# EAGLE board SparkFun Qwiic Mini Human Presence Sensor - STHS34PF80-Panel (EAGLE 9.6.2), part 1 of 4
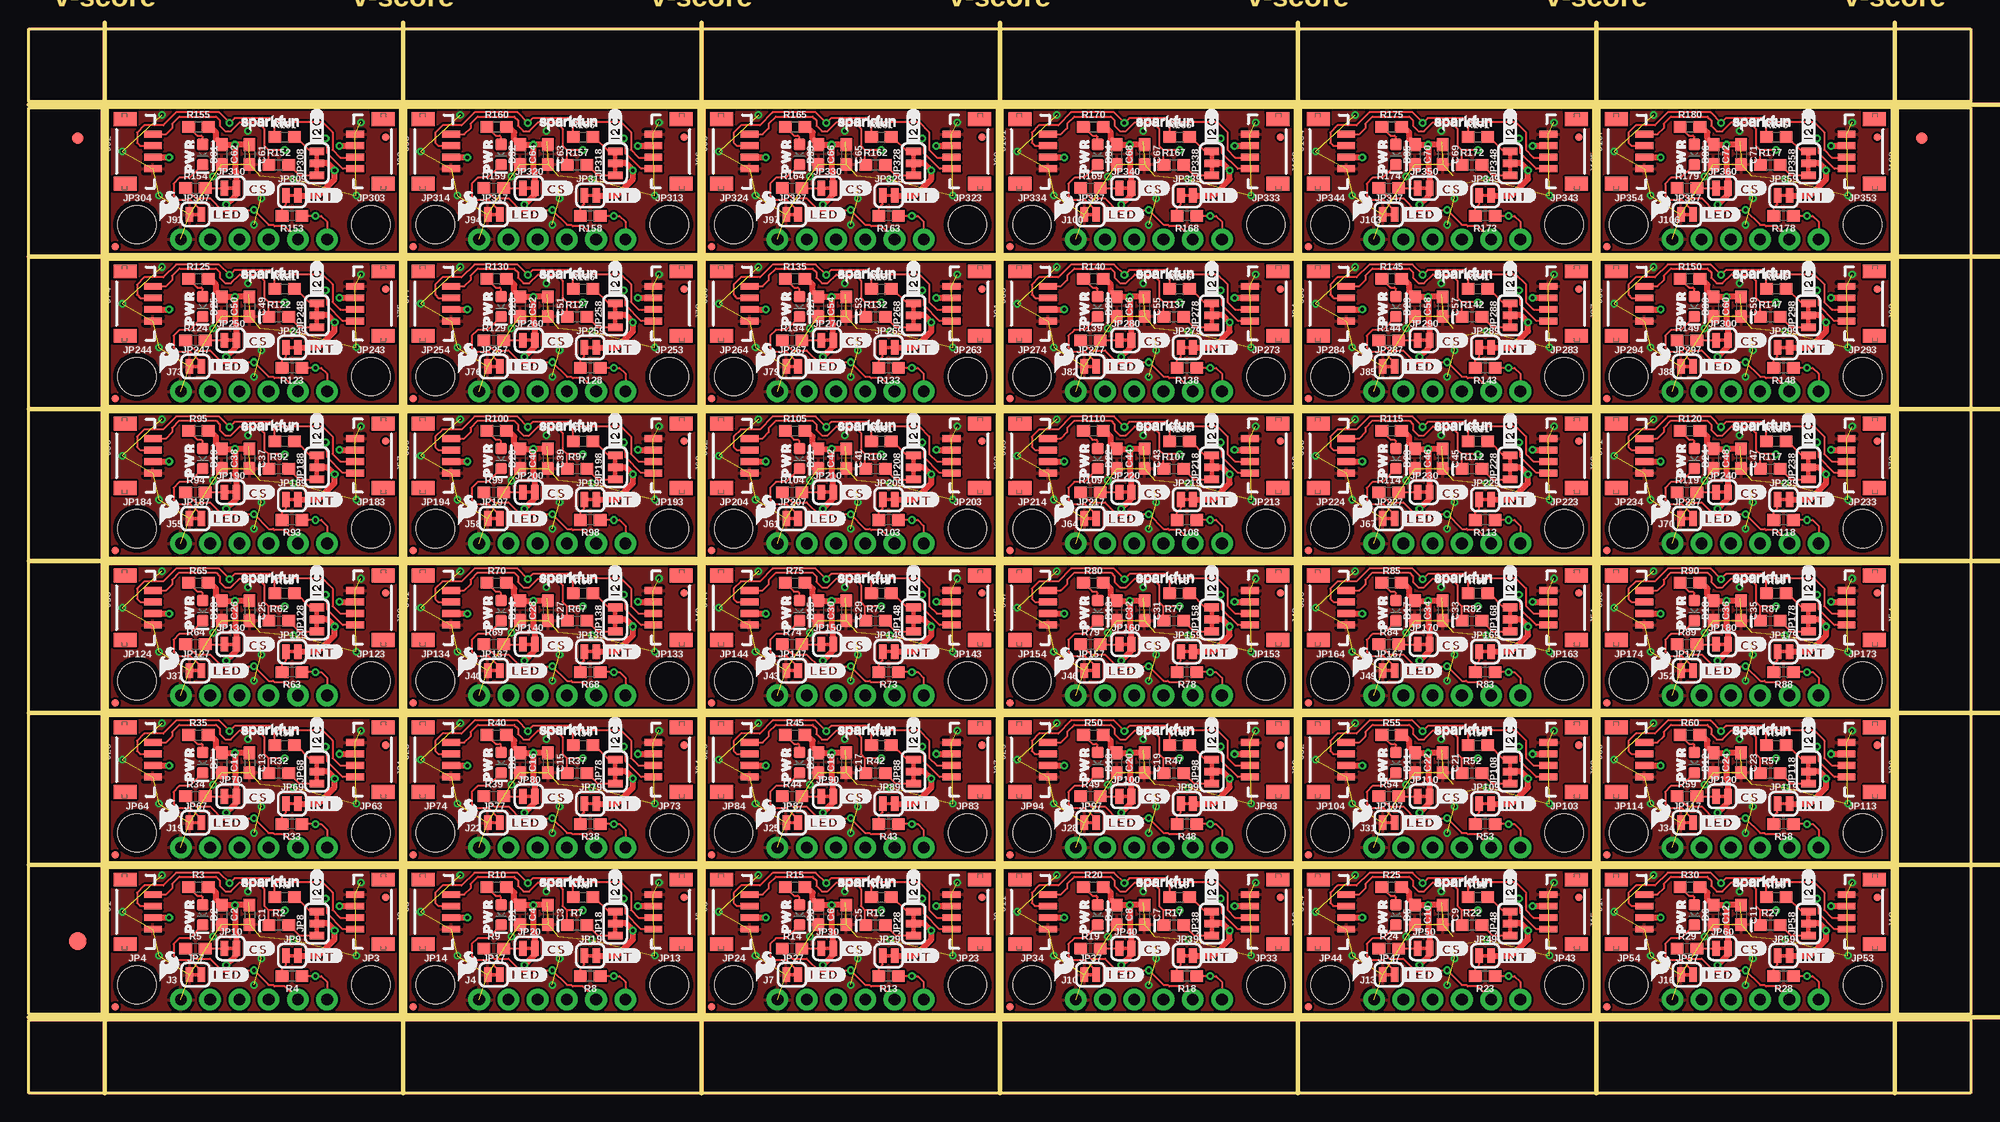
[diagram p0: board, top side]
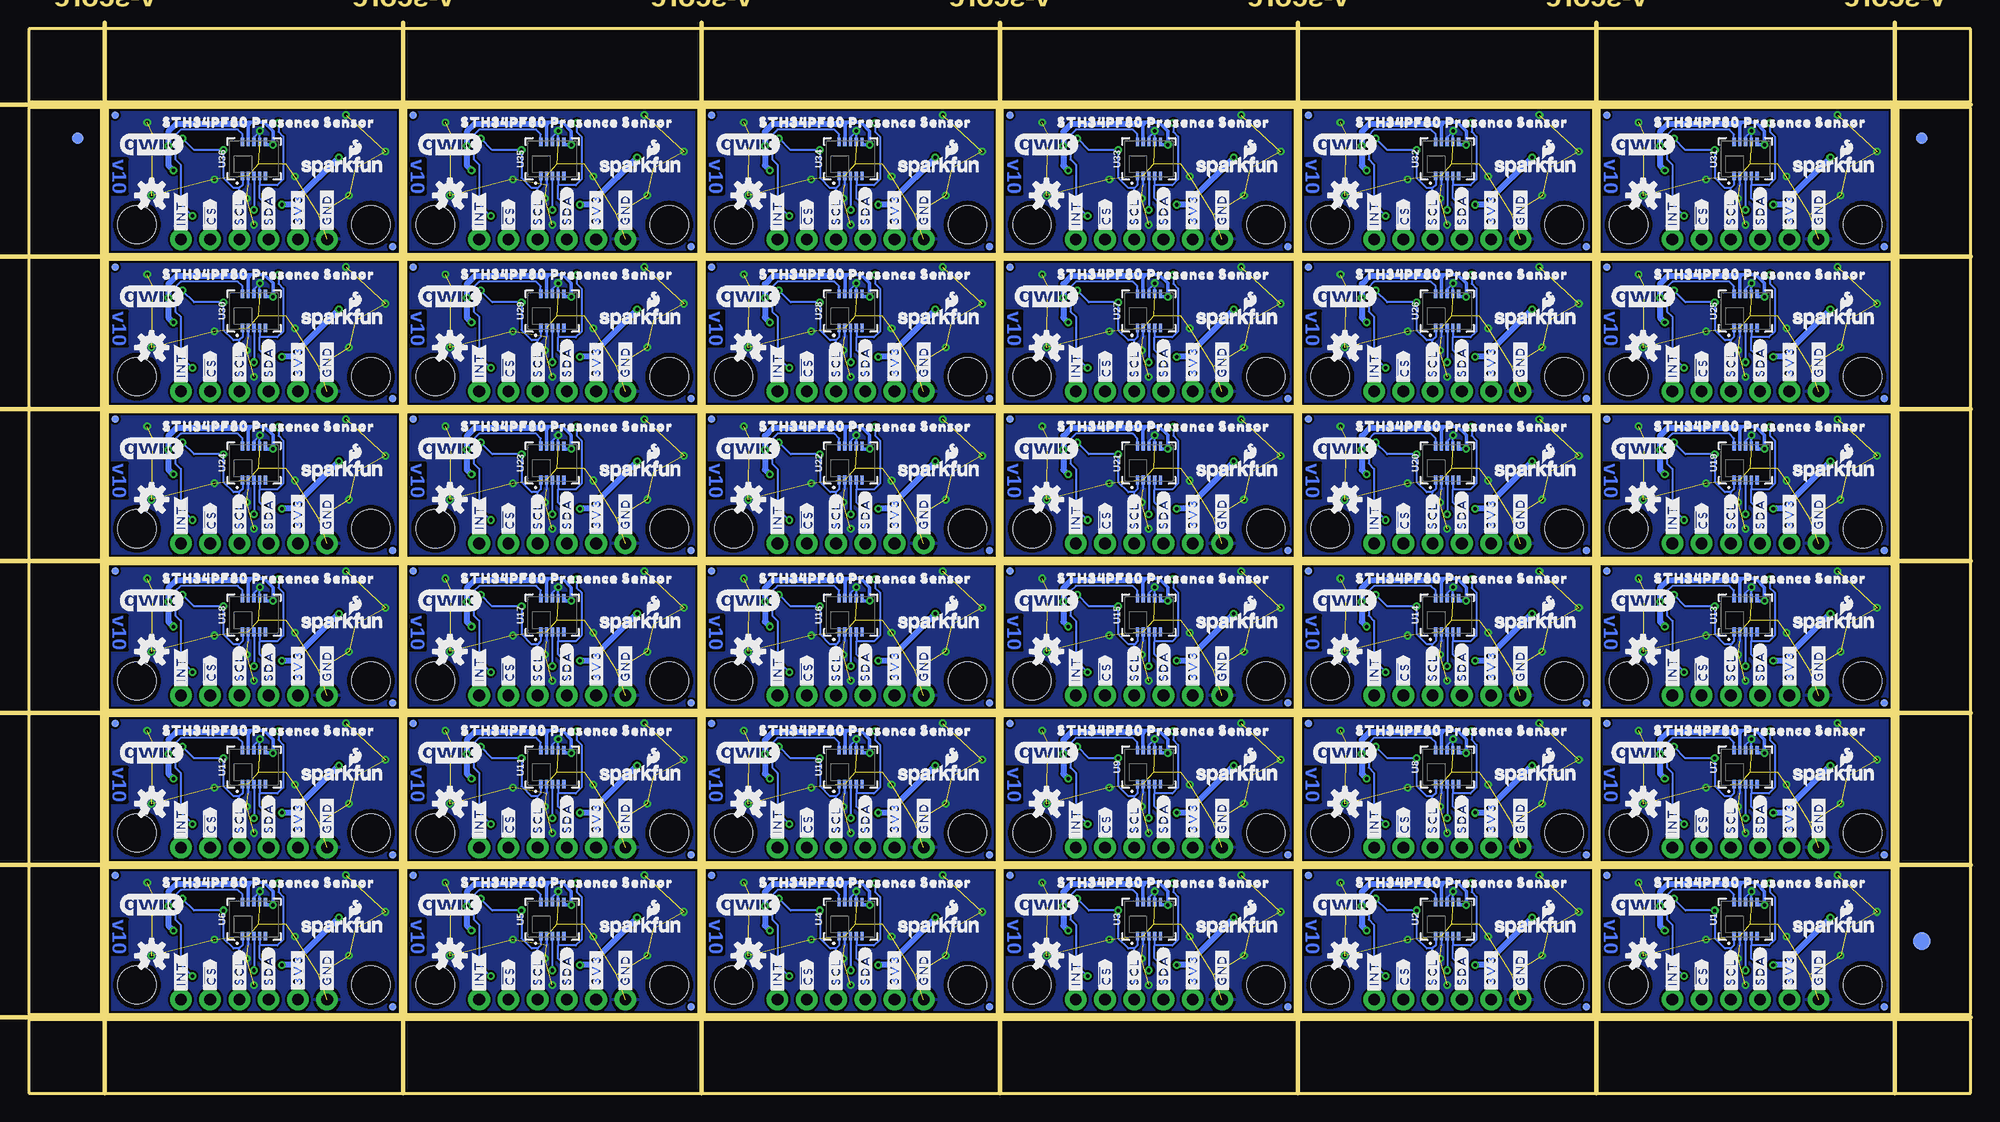
[diagram p1: board, bottom side, seen from below]

Size 168.66 x 92.46 mm. Coordinates in mm from the lower left corner, seen from the top.
Outline: 160 segments
Copper layers (1*16): Top 0.035mm / dielectric 1.5mm / Bottom 0.035mm
Design rules "SparkFun Qwiic Mini Human Presence Sensor - STHS34PF80": minimum track width 7mil, minimum drill 0.3mm, track to track 7mil, track to pad 7mil, pad to pad 7mil, via to via 7mil, smd to smd 7mil, copper to edge 7mil, drill to drill 7mil, minimum pad ring 7mil, minimum via ring 7mil, stop-mask expansion 3mil, vias tented up to drill 25mil, thermal gap 10mil
bKeepout: area 17.3,13.3 to 21.8,16.9; area 43.2,13.3 to 47.8,16.9; area 69.1,13.3 to 73.7,16.9; area 95,13.3 to 99.6,16.9; area 120.9,13.3 to 125.5,16.9; area 146.8,13.3 to 151.4,16.9; area 17.3,26.5 to 21.8,30.1; area 43.2,26.5 to 47.8,30.1; area 69.1,26.5 to 73.7,30.1; area 95,26.5 to 99.6,30.1; area 120.9,26.5 to 125.5,30.1; area 146.8,26.5 to 151.4,30.1; 24 more areas
bRestrict: area 17.3,13.3 to 21.8,16.9; area 43.2,13.3 to 47.8,16.9; area 69.1,13.3 to 73.7,16.9; area 95,13.3 to 99.6,16.9; area 120.9,13.3 to 125.5,16.9; area 146.8,13.3 to 151.4,16.9; area 17.3,26.5 to 21.8,30.1; area 43.2,26.5 to 47.8,30.1; area 69.1,26.5 to 73.7,30.1; area 95,26.5 to 99.6,30.1; area 120.9,26.5 to 125.5,30.1; area 146.8,26.5 to 151.4,30.1; 24 more areas
Milling: 14 lines

## Footprints (pad centres in the part's own frame; a part is rotated, then mirrored left to right if it is on the bottom)
0603 = smd 1.1 x 1: 1 -0.85,0; 2 0.85,0
LED-0603 = smd 1 x 1: A -0.877,0; C 0.877,0
FIDUCIAL-1X2 = smd 1 x 1: 1 0,0
FIDUCIAL-1.5X3 = smd 1.5 x 1.5: 1 0,0
JST04_1MM_VERT = smd 0.6 x 1.55: 1 -1.5,0.775; 2 -0.5,0.775; 3 0.5,0.775; 4 1.5,0.775 | smd 1.2 x 2: NC1 -2.8,3.2; NC2 2.8,3.2
1X06_NO_SILK = drill 1.016 pad 1.88: 1 0,0; 2 2.54,0; 3 5.08,0; 4 7.62,0; 5 10.16,0; 6 12.7,0
FIDUCIAL-MICRO = smd 0.635 x 0.635: 1 0,0
STAND-OFF = hole 3.302: 0,0
SMT-JUMPER_2_NC_TRACE_SILK = smd 0.66 x 1.27: 1 -0.521,0; 2 0.521,0
SMT-JUMPER_3_2-NC_TRACE_SILK = smd 0.66 x 1.27: 1 -1.041,0; 2 0,0; 3 1.041,0
OLGA-10L = smd 0.75 x 0.285: 1 -1.475,1; 2 -1.475,0.5; 3 -1.475,0; 4 -1.475,-0.5; 5 -1.475,-1; 6 1.475,-1; 7 1.475,-0.5; 8 1.475,0; 9 1.475,0.5; 10 1.475,1

## Placement (x,y rotation side)
C1  1.0uF  [0603]  19.18,15.49 270 top
C2  0.1uF  [0603]  16.76,15.49 270 top
C3  1.0uF  [0603]  45.08,15.49 270 top
C4  0.1uF  [0603]  42.67,15.49 270 top
C5  1.0uF  [0603]  70.99,15.49 270 top
C6  0.1uF  [0603]  68.58,15.49 270 top
C7  1.0uF  [0603]  96.9,15.49 270 top
C8  0.1uF  [0603]  94.49,15.49 270 top
C9  1.0uF  [0603]  122.81,15.49 270 top
C10  0.1uF  [0603]  120.4,15.49 270 top
C11  1.0uF  [0603]  148.72,15.49 270 top
C12  0.1uF  [0603]  146.3,15.49 270 top
C13  1.0uF  [0603]  19.18,28.7 270 top
C14  0.1uF  [0603]  16.76,28.7 270 top
C15  1.0uF  [0603]  45.08,28.7 270 top
C16  0.1uF  [0603]  42.67,28.7 270 top
C17  1.0uF  [0603]  70.99,28.7 270 top
C18  0.1uF  [0603]  68.58,28.7 270 top
C19  1.0uF  [0603]  96.9,28.7 270 top
C20  0.1uF  [0603]  94.49,28.7 270 top
C21  1.0uF  [0603]  122.81,28.7 270 top
C22  0.1uF  [0603]  120.4,28.7 270 top
C23  1.0uF  [0603]  148.72,28.7 270 top
C24  0.1uF  [0603]  146.3,28.7 270 top
C25  1.0uF  [0603]  19.18,41.91 270 top
C26  0.1uF  [0603]  16.76,41.91 270 top
C27  1.0uF  [0603]  45.08,41.91 270 top
C28  0.1uF  [0603]  42.67,41.91 270 top
C29  1.0uF  [0603]  70.99,41.91 270 top
C30  0.1uF  [0603]  68.58,41.91 270 top
C31  1.0uF  [0603]  96.9,41.91 270 top
C32  0.1uF  [0603]  94.49,41.91 270 top
C33  1.0uF  [0603]  122.81,41.91 270 top
C34  0.1uF  [0603]  120.4,41.91 270 top
C35  1.0uF  [0603]  148.72,41.91 270 top
C36  0.1uF  [0603]  146.3,41.91 270 top
C37  1.0uF  [0603]  19.18,55.12 270 top
C38  0.1uF  [0603]  16.76,55.12 270 top
C39  1.0uF  [0603]  45.08,55.12 270 top
C40  0.1uF  [0603]  42.67,55.12 270 top
C41  1.0uF  [0603]  70.99,55.12 270 top
C42  0.1uF  [0603]  68.58,55.12 270 top
C43  1.0uF  [0603]  96.9,55.12 270 top
C44  0.1uF  [0603]  94.49,55.12 270 top
C45  1.0uF  [0603]  122.81,55.12 270 top
C46  0.1uF  [0603]  120.4,55.12 270 top
C47  1.0uF  [0603]  148.72,55.12 270 top
C48  0.1uF  [0603]  146.3,55.12 270 top
C49  1.0uF  [0603]  19.18,68.33 270 top
C50  0.1uF  [0603]  16.76,68.33 270 top
C51  1.0uF  [0603]  45.08,68.33 270 top
C52  0.1uF  [0603]  42.67,68.33 270 top
C53  1.0uF  [0603]  70.99,68.33 270 top
C54  0.1uF  [0603]  68.58,68.33 270 top
C55  1.0uF  [0603]  96.9,68.33 270 top
C56  0.1uF  [0603]  94.49,68.33 270 top
C57  1.0uF  [0603]  122.81,68.33 270 top
C58  0.1uF  [0603]  120.4,68.33 270 top
C59  1.0uF  [0603]  148.72,68.33 270 top
C60  0.1uF  [0603]  146.3,68.33 270 top
C61  1.0uF  [0603]  19.18,81.53 270 top
C62  0.1uF  [0603]  16.76,81.53 270 top
C63  1.0uF  [0603]  45.08,81.53 270 top
C64  0.1uF  [0603]  42.67,81.53 270 top
C65  1.0uF  [0603]  70.99,81.53 270 top
C66  0.1uF  [0603]  68.58,81.53 270 top
C67  1.0uF  [0603]  96.9,81.53 270 top
C68  0.1uF  [0603]  94.49,81.53 270 top
C69  1.0uF  [0603]  122.81,81.53 270 top
C70  0.1uF  [0603]  120.4,81.53 270 top
C71  1.0uF  [0603]  148.72,81.53 270 top
C72  0.1uF  [0603]  146.3,81.53 270 top
D1  RED  [LED-0603]  41.02,15.49 270 top
D2  RED  [LED-0603]  15.11,15.49 270 top
D3  RED  [LED-0603]  66.93,15.49 270 top
D4  RED  [LED-0603]  92.84,15.49 270 top
D5  RED  [LED-0603]  118.75,15.49 270 top
D6  RED  [LED-0603]  144.65,15.49 270 top
D7  RED  [LED-0603]  15.11,28.7 270 top
D8  RED  [LED-0603]  41.02,28.7 270 top
D9  RED  [LED-0603]  66.93,28.7 270 top
D10  RED  [LED-0603]  92.84,28.7 270 top
D11  RED  [LED-0603]  118.75,28.7 270 top
D12  RED  [LED-0603]  144.65,28.7 270 top
D13  RED  [LED-0603]  15.11,41.91 270 top
D14  RED  [LED-0603]  41.02,41.91 270 top
D15  RED  [LED-0603]  66.93,41.91 270 top
D16  RED  [LED-0603]  92.84,41.91 270 top
D17  RED  [LED-0603]  118.75,41.91 270 top
D18  RED  [LED-0603]  144.65,41.91 270 top
D19  RED  [LED-0603]  15.11,55.12 270 top
D20  RED  [LED-0603]  41.02,55.12 270 top
D21  RED  [LED-0603]  66.93,55.12 270 top
D22  RED  [LED-0603]  92.84,55.12 270 top
D23  RED  [LED-0603]  118.75,55.12 270 top
D24  RED  [LED-0603]  144.65,55.12 270 top
D25  RED  [LED-0603]  15.11,68.33 270 top
D26  RED  [LED-0603]  41.02,68.33 270 top
D27  RED  [LED-0603]  66.93,68.33 270 top
D28  RED  [LED-0603]  92.84,68.33 270 top
D29  RED  [LED-0603]  118.75,68.33 270 top
D30  RED  [LED-0603]  144.65,68.33 270 top
D31  RED  [LED-0603]  15.11,81.53 270 top
D32  RED  [LED-0603]  41.02,81.53 270 top
D33  RED  [LED-0603]  66.93,81.53 270 top
D34  RED  [LED-0603]  92.84,81.53 270 top
D35  RED  [LED-0603]  118.75,81.53 270 top
D36  RED  [LED-0603]  144.65,81.53 270 top
E$1  [FIDUCIAL-1X2]  4.23,82.93 0 top
E$2  [FIDUCIAL-1X2]  4.23,82.93 0 bottom
E$3  [FIDUCIAL-1X2]  164.42,82.93 0 top
E$4  [FIDUCIAL-1X2]  164.42,82.93 0 bottom
E$5  [FIDUCIAL-1.5X3]  4.23,13.21 0 top
E$6  [FIDUCIAL-1.5X3]  4.23,13.21 0 bottom
J1  Vertical Qwiic Connector  [JST04_1MM_VERT]  11.56,15.75 90 top
J2  Vertical Qwiic Connector  [JST04_1MM_VERT]  27.56,15.75 270 top
J3  [1X06_NO_SILK]  13.21,8.13 0 top
J4  [1X06_NO_SILK]  39.12,8.13 0 top
J5  Vertical Qwiic Connector  [JST04_1MM_VERT]  37.46,15.75 90 top
J6  Vertical Qwiic Connector  [JST04_1MM_VERT]  53.47,15.75 270 top
J7  [1X06_NO_SILK]  65.02,8.13 0 top
J8  Vertical Qwiic Connector  [JST04_1MM_VERT]  63.37,15.75 90 top
J9  Vertical Qwiic Connector  [JST04_1MM_VERT]  79.38,15.75 270 top
J10  [1X06_NO_SILK]  90.93,8.13 0 top
J11  Vertical Qwiic Connector  [JST04_1MM_VERT]  89.28,15.75 90 top
J12  Vertical Qwiic Connector  [JST04_1MM_VERT]  105.28,15.75 270 top
J13  [1X06_NO_SILK]  116.84,8.13 0 top
J14  Vertical Qwiic Connector  [JST04_1MM_VERT]  115.19,15.75 90 top
J15  Vertical Qwiic Connector  [JST04_1MM_VERT]  131.19,15.75 270 top
J16  [1X06_NO_SILK]  142.75,8.13 0 top
J17  Vertical Qwiic Connector  [JST04_1MM_VERT]  141.1,15.75 90 top
J18  Vertical Qwiic Connector  [JST04_1MM_VERT]  157.1,15.75 270 top
J19  [1X06_NO_SILK]  13.21,21.34 0 top
J20  Vertical Qwiic Connector  [JST04_1MM_VERT]  11.56,28.96 90 top
J21  Vertical Qwiic Connector  [JST04_1MM_VERT]  27.56,28.96 270 top
J22  [1X06_NO_SILK]  39.12,21.34 0 top
J23  Vertical Qwiic Connector  [JST04_1MM_VERT]  37.46,28.96 90 top
J24  Vertical Qwiic Connector  [JST04_1MM_VERT]  53.47,28.96 270 top
J25  [1X06_NO_SILK]  65.02,21.34 0 top
J26  Vertical Qwiic Connector  [JST04_1MM_VERT]  63.37,28.96 90 top
J27  Vertical Qwiic Connector  [JST04_1MM_VERT]  79.38,28.96 270 top
J28  [1X06_NO_SILK]  90.93,21.34 0 top
J29  Vertical Qwiic Connector  [JST04_1MM_VERT]  89.28,28.96 90 top
J30  Vertical Qwiic Connector  [JST04_1MM_VERT]  105.28,28.96 270 top
J31  [1X06_NO_SILK]  116.84,21.34 0 top
J32  Vertical Qwiic Connector  [JST04_1MM_VERT]  115.19,28.96 90 top
J33  Vertical Qwiic Connector  [JST04_1MM_VERT]  131.19,28.96 270 top
J34  [1X06_NO_SILK]  142.75,21.34 0 top
J35  Vertical Qwiic Connector  [JST04_1MM_VERT]  141.1,28.96 90 top
J36  Vertical Qwiic Connector  [JST04_1MM_VERT]  157.1,28.96 270 top
J37  [1X06_NO_SILK]  13.21,34.54 0 top
J38  Vertical Qwiic Connector  [JST04_1MM_VERT]  11.56,42.16 90 top
J39  Vertical Qwiic Connector  [JST04_1MM_VERT]  27.56,42.16 270 top
J40  [1X06_NO_SILK]  39.12,34.54 0 top
J41  Vertical Qwiic Connector  [JST04_1MM_VERT]  37.46,42.16 90 top
J42  Vertical Qwiic Connector  [JST04_1MM_VERT]  53.47,42.16 270 top
J43  [1X06_NO_SILK]  65.02,34.54 0 top
J44  Vertical Qwiic Connector  [JST04_1MM_VERT]  63.37,42.16 90 top
J45  Vertical Qwiic Connector  [JST04_1MM_VERT]  79.38,42.16 270 top
J46  [1X06_NO_SILK]  90.93,34.54 0 top
J47  Vertical Qwiic Connector  [JST04_1MM_VERT]  89.28,42.16 90 top
J48  Vertical Qwiic Connector  [JST04_1MM_VERT]  105.28,42.16 270 top
J49  [1X06_NO_SILK]  116.84,34.54 0 top
J50  Vertical Qwiic Connector  [JST04_1MM_VERT]  115.19,42.16 90 top
J51  Vertical Qwiic Connector  [JST04_1MM_VERT]  131.19,42.16 270 top
J52  [1X06_NO_SILK]  142.75,34.54 0 top
J53  Vertical Qwiic Connector  [JST04_1MM_VERT]  141.1,42.16 90 top
J54  Vertical Qwiic Connector  [JST04_1MM_VERT]  157.1,42.16 270 top
J55  [1X06_NO_SILK]  13.21,47.75 0 top
J56  Vertical Qwiic Connector  [JST04_1MM_VERT]  11.56,55.37 90 top
J57  Vertical Qwiic Connector  [JST04_1MM_VERT]  27.56,55.37 270 top
J58  [1X06_NO_SILK]  39.12,47.75 0 top
J59  Vertical Qwiic Connector  [JST04_1MM_VERT]  37.46,55.37 90 top
J60  Vertical Qwiic Connector  [JST04_1MM_VERT]  53.47,55.37 270 top
J61  [1X06_NO_SILK]  65.02,47.75 0 top
J62  Vertical Qwiic Connector  [JST04_1MM_VERT]  63.37,55.37 90 top
J63  Vertical Qwiic Connector  [JST04_1MM_VERT]  79.38,55.37 270 top
J64  [1X06_NO_SILK]  90.93,47.75 0 top
J65  Vertical Qwiic Connector  [JST04_1MM_VERT]  89.28,55.37 90 top
J66  Vertical Qwiic Connector  [JST04_1MM_VERT]  105.28,55.37 270 top
J67  [1X06_NO_SILK]  116.84,47.75 0 top
J68  Vertical Qwiic Connector  [JST04_1MM_VERT]  115.19,55.37 90 top
J69  Vertical Qwiic Connector  [JST04_1MM_VERT]  131.19,55.37 270 top
J70  [1X06_NO_SILK]  142.75,47.75 0 top
J71  Vertical Qwiic Connector  [JST04_1MM_VERT]  141.1,55.37 90 top
J72  Vertical Qwiic Connector  [JST04_1MM_VERT]  157.1,55.37 270 top
J73  [1X06_NO_SILK]  13.21,60.96 0 top
J74  Vertical Qwiic Connector  [JST04_1MM_VERT]  11.56,68.58 90 top
J75  Vertical Qwiic Connector  [JST04_1MM_VERT]  27.56,68.58 270 top
J76  [1X06_NO_SILK]  39.12,60.96 0 top
J77  Vertical Qwiic Connector  [JST04_1MM_VERT]  37.46,68.58 90 top
J78  Vertical Qwiic Connector  [JST04_1MM_VERT]  53.47,68.58 270 top
J79  [1X06_NO_SILK]  65.02,60.96 0 top
J80  Vertical Qwiic Connector  [JST04_1MM_VERT]  63.37,68.58 90 top
J81  Vertical Qwiic Connector  [JST04_1MM_VERT]  79.38,68.58 270 top
J82  [1X06_NO_SILK]  90.93,60.96 0 top
J83  Vertical Qwiic Connector  [JST04_1MM_VERT]  89.28,68.58 90 top
J84  Vertical Qwiic Connector  [JST04_1MM_VERT]  105.28,68.58 270 top
J85  [1X06_NO_SILK]  116.84,60.96 0 top
J86  Vertical Qwiic Connector  [JST04_1MM_VERT]  115.19,68.58 90 top
J87  Vertical Qwiic Connector  [JST04_1MM_VERT]  131.19,68.58 270 top
J88  [1X06_NO_SILK]  142.75,60.96 0 top
J89  Vertical Qwiic Connector  [JST04_1MM_VERT]  141.1,68.58 90 top
J90  Vertical Qwiic Connector  [JST04_1MM_VERT]  157.1,68.58 270 top
J91  [1X06_NO_SILK]  13.21,74.17 0 top
J92  Vertical Qwiic Connector  [JST04_1MM_VERT]  11.56,81.79 90 top
J93  Vertical Qwiic Connector  [JST04_1MM_VERT]  27.56,81.79 270 top
J94  [1X06_NO_SILK]  39.12,74.17 0 top
J95  Vertical Qwiic Connector  [JST04_1MM_VERT]  37.46,81.79 90 top
J96  Vertical Qwiic Connector  [JST04_1MM_VERT]  53.47,81.79 270 top
J97  [1X06_NO_SILK]  65.02,74.17 0 top
J98  Vertical Qwiic Connector  [JST04_1MM_VERT]  63.37,81.79 90 top
J99  Vertical Qwiic Connector  [JST04_1MM_VERT]  79.38,81.79 270 top
J100  [1X06_NO_SILK]  90.93,74.17 0 top
J101  Vertical Qwiic Connector  [JST04_1MM_VERT]  89.28,81.79 90 top
J102  Vertical Qwiic Connector  [JST04_1MM_VERT]  105.28,81.79 270 top
J103  [1X06_NO_SILK]  116.84,74.17 0 top
J104  Vertical Qwiic Connector  [JST04_1MM_VERT]  115.19,81.79 90 top
J105  Vertical Qwiic Connector  [JST04_1MM_VERT]  131.19,81.79 270 top
J106  [1X06_NO_SILK]  142.75,74.17 0 top
J107  Vertical Qwiic Connector  [JST04_1MM_VERT]  141.1,81.79 90 top
J108  Vertical Qwiic Connector  [JST04_1MM_VERT]  157.1,81.79 270 top
JP1  FIDUCIALUFIDUCIAL  [FIDUCIAL-MICRO]  7.49,7.49 0 top
JP2  FIDUCIALUFIDUCIAL  [FIDUCIAL-MICRO]  7.49,7.49 0 bottom
JP3  STAND-OFF  [STAND-OFF]  29.72,9.4 0 top
JP4  STAND-OFF  [STAND-OFF]  9.4,9.4 0 top
JP5  FIDUCIALUFIDUCIAL  [FIDUCIAL-MICRO]  31.62,18.92 0 bottom
JP6  FIDUCIALUFIDUCIAL  [FIDUCIAL-MICRO]  30.99,17.02 0 top
JP7  JUMPER-SMT_2_NC_TRACE_SILK  [SMT-JUMPER_2_NC_TRACE_SILK]  14.48,10.29 0 top
JP8  JUMPER-SMT_3_2-NC_TRACE_SILK  [SMT-JUMPER_3_2-NC_TRACE_SILK]  25.02,14.73 90 top
JP9  JUMPER-SMT_2_NC_TRACE_SILK  [SMT-JUMPER_2_NC_TRACE_SILK]  22.86,11.94 0 top
JP10  JUMPER-SMT_2_NC_TRACE_SILK  [SMT-JUMPER_2_NC_TRACE_SILK]  17.53,12.57 0 top
JP11  FIDUCIALUFIDUCIAL  [FIDUCIAL-MICRO]  33.4,7.49 0 top
JP12  FIDUCIALUFIDUCIAL  [FIDUCIAL-MICRO]  33.4,7.49 0 bottom
JP13  STAND-OFF  [STAND-OFF]  55.63,9.4 0 top
JP14  STAND-OFF  [STAND-OFF]  35.31,9.4 0 top
JP15  FIDUCIALUFIDUCIAL  [FIDUCIAL-MICRO]  57.53,18.92 0 bottom
JP16  FIDUCIALUFIDUCIAL  [FIDUCIAL-MICRO]  56.9,17.02 0 top
JP17  JUMPER-SMT_2_NC_TRACE_SILK  [SMT-JUMPER_2_NC_TRACE_SILK]  40.39,10.29 0 top
JP18  JUMPER-SMT_3_2-NC_TRACE_SILK  [SMT-JUMPER_3_2-NC_TRACE_SILK]  50.93,14.73 90 top
JP19  JUMPER-SMT_2_NC_TRACE_SILK  [SMT-JUMPER_2_NC_TRACE_SILK]  48.77,11.94 0 top
JP20  JUMPER-SMT_2_NC_TRACE_SILK  [SMT-JUMPER_2_NC_TRACE_SILK]  43.43,12.57 0 top
JP21  FIDUCIALUFIDUCIAL  [FIDUCIAL-MICRO]  59.31,7.49 0 top
JP22  FIDUCIALUFIDUCIAL  [FIDUCIAL-MICRO]  59.31,7.49 0 bottom
JP23  STAND-OFF  [STAND-OFF]  81.53,9.4 0 top
JP24  STAND-OFF  [STAND-OFF]  61.21,9.4 0 top
JP25  FIDUCIALUFIDUCIAL  [FIDUCIAL-MICRO]  83.44,18.92 0 bottom
JP26  FIDUCIALUFIDUCIAL  [FIDUCIAL-MICRO]  82.8,17.02 0 top
JP27  JUMPER-SMT_2_NC_TRACE_SILK  [SMT-JUMPER_2_NC_TRACE_SILK]  66.29,10.29 0 top
JP28  JUMPER-SMT_3_2-NC_TRACE_SILK  [SMT-JUMPER_3_2-NC_TRACE_SILK]  76.84,14.73 90 top
JP29  JUMPER-SMT_2_NC_TRACE_SILK  [SMT-JUMPER_2_NC_TRACE_SILK]  74.68,11.94 0 top
JP30  JUMPER-SMT_2_NC_TRACE_SILK  [SMT-JUMPER_2_NC_TRACE_SILK]  69.34,12.57 0 top
JP31  FIDUCIALUFIDUCIAL  [FIDUCIAL-MICRO]  85.22,7.49 0 top
JP32  FIDUCIALUFIDUCIAL  [FIDUCIAL-MICRO]  85.22,7.49 0 bottom
JP33  STAND-OFF  [STAND-OFF]  107.44,9.4 0 top
JP34  STAND-OFF  [STAND-OFF]  87.12,9.4 0 top
JP35  FIDUCIALUFIDUCIAL  [FIDUCIAL-MICRO]  109.35,18.92 0 bottom
JP36  FIDUCIALUFIDUCIAL  [FIDUCIAL-MICRO]  108.71,17.02 0 top
JP37  JUMPER-SMT_2_NC_TRACE_SILK  [SMT-JUMPER_2_NC_TRACE_SILK]  92.2,10.29 0 top
JP38  JUMPER-SMT_3_2-NC_TRACE_SILK  [SMT-JUMPER_3_2-NC_TRACE_SILK]  102.74,14.73 90 top
JP39  JUMPER-SMT_2_NC_TRACE_SILK  [SMT-JUMPER_2_NC_TRACE_SILK]  100.58,11.94 0 top
JP40  JUMPER-SMT_2_NC_TRACE_SILK  [SMT-JUMPER_2_NC_TRACE_SILK]  95.25,12.57 0 top
JP41  FIDUCIALUFIDUCIAL  [FIDUCIAL-MICRO]  111.12,7.49 0 top
JP42  FIDUCIALUFIDUCIAL  [FIDUCIAL-MICRO]  111.12,7.49 0 bottom
JP43  STAND-OFF  [STAND-OFF]  133.35,9.4 0 top
JP44  STAND-OFF  [STAND-OFF]  113.03,9.4 0 top
JP45  FIDUCIALUFIDUCIAL  [FIDUCIAL-MICRO]  135.25,18.92 0 bottom
JP46  FIDUCIALUFIDUCIAL  [FIDUCIAL-MICRO]  134.62,17.02 0 top
JP47  JUMPER-SMT_2_NC_TRACE_SILK  [SMT-JUMPER_2_NC_TRACE_SILK]  118.11,10.29 0 top
JP48  JUMPER-SMT_3_2-NC_TRACE_SILK  [SMT-JUMPER_3_2-NC_TRACE_SILK]  128.65,14.73 90 top
JP49  JUMPER-SMT_2_NC_TRACE_SILK  [SMT-JUMPER_2_NC_TRACE_SILK]  126.49,11.94 0 top
JP50  JUMPER-SMT_2_NC_TRACE_SILK  [SMT-JUMPER_2_NC_TRACE_SILK]  121.16,12.57 0 top
JP51  FIDUCIALUFIDUCIAL  [FIDUCIAL-MICRO]  137.03,7.49 0 top
JP52  FIDUCIALUFIDUCIAL  [FIDUCIAL-MICRO]  137.03,7.49 0 bottom
JP53  STAND-OFF  [STAND-OFF]  159.26,9.4 0 top
JP54  STAND-OFF  [STAND-OFF]  138.94,9.4 0 top
JP55  FIDUCIALUFIDUCIAL  [FIDUCIAL-MICRO]  161.16,18.92 0 bottom
JP56  FIDUCIALUFIDUCIAL  [FIDUCIAL-MICRO]  160.53,17.02 0 top
JP57  JUMPER-SMT_2_NC_TRACE_SILK  [SMT-JUMPER_2_NC_TRACE_SILK]  144.02,10.29 0 top
JP58  JUMPER-SMT_3_2-NC_TRACE_SILK  [SMT-JUMPER_3_2-NC_TRACE_SILK]  154.56,14.73 90 top
JP59  JUMPER-SMT_2_NC_TRACE_SILK  [SMT-JUMPER_2_NC_TRACE_SILK]  152.4,11.94 0 top
JP60  JUMPER-SMT_2_NC_TRACE_SILK  [SMT-JUMPER_2_NC_TRACE_SILK]  147.07,12.57 0 top
JP61  FIDUCIALUFIDUCIAL  [FIDUCIAL-MICRO]  7.49,20.7 0 top
JP62  FIDUCIALUFIDUCIAL  [FIDUCIAL-MICRO]  7.49,20.7 0 bottom
JP63  STAND-OFF  [STAND-OFF]  29.72,22.61 0 top
JP64  STAND-OFF  [STAND-OFF]  9.4,22.61 0 top
JP65  FIDUCIALUFIDUCIAL  [FIDUCIAL-MICRO]  31.62,32.13 0 bottom
JP66  FIDUCIALUFIDUCIAL  [FIDUCIAL-MICRO]  30.99,30.23 0 top
JP67  JUMPER-SMT_2_NC_TRACE_SILK  [SMT-JUMPER_2_NC_TRACE_SILK]  14.48,23.5 0 top
JP68  JUMPER-SMT_3_2-NC_TRACE_SILK  [SMT-JUMPER_3_2-NC_TRACE_SILK]  25.02,27.94 90 top
JP69  JUMPER-SMT_2_NC_TRACE_SILK  [SMT-JUMPER_2_NC_TRACE_SILK]  22.86,25.15 0 top
JP70  JUMPER-SMT_2_NC_TRACE_SILK  [SMT-JUMPER_2_NC_TRACE_SILK]  17.53,25.78 0 top
JP71  FIDUCIALUFIDUCIAL  [FIDUCIAL-MICRO]  33.4,20.7 0 top
JP72  FIDUCIALUFIDUCIAL  [FIDUCIAL-MICRO]  33.4,20.7 0 bottom
JP73  STAND-OFF  [STAND-OFF]  55.63,22.61 0 top
JP74  STAND-OFF  [STAND-OFF]  35.31,22.61 0 top
JP75  FIDUCIALUFIDUCIAL  [FIDUCIAL-MICRO]  57.53,32.13 0 bottom
JP76  FIDUCIALUFIDUCIAL  [FIDUCIAL-MICRO]  56.9,30.23 0 top
JP77  JUMPER-SMT_2_NC_TRACE_SILK  [SMT-JUMPER_2_NC_TRACE_SILK]  40.39,23.5 0 top
JP78  JUMPER-SMT_3_2-NC_TRACE_SILK  [SMT-JUMPER_3_2-NC_TRACE_SILK]  50.93,27.94 90 top
JP79  JUMPER-SMT_2_NC_TRACE_SILK  [SMT-JUMPER_2_NC_TRACE_SILK]  48.77,25.15 0 top
JP80  JUMPER-SMT_2_NC_TRACE_SILK  [SMT-JUMPER_2_NC_TRACE_SILK]  43.43,25.78 0 top
JP81  FIDUCIALUFIDUCIAL  [FIDUCIAL-MICRO]  59.31,20.7 0 top
JP82  FIDUCIALUFIDUCIAL  [FIDUCIAL-MICRO]  59.31,20.7 0 bottom
JP83  STAND-OFF  [STAND-OFF]  81.53,22.61 0 top
JP84  STAND-OFF  [STAND-OFF]  61.21,22.61 0 top
JP85  FIDUCIALUFIDUCIAL  [FIDUCIAL-MICRO]  83.44,32.13 0 bottom
JP86  FIDUCIALUFIDUCIAL  [FIDUCIAL-MICRO]  82.8,30.23 0 top
JP87  JUMPER-SMT_2_NC_TRACE_SILK  [SMT-JUMPER_2_NC_TRACE_SILK]  66.29,23.5 0 top
JP88  JUMPER-SMT_3_2-NC_TRACE_SILK  [SMT-JUMPER_3_2-NC_TRACE_SILK]  76.84,27.94 90 top
JP89  JUMPER-SMT_2_NC_TRACE_SILK  [SMT-JUMPER_2_NC_TRACE_SILK]  74.68,25.15 0 top
JP90  JUMPER-SMT_2_NC_TRACE_SILK  [SMT-JUMPER_2_NC_TRACE_SILK]  69.34,25.78 0 top
JP91  FIDUCIALUFIDUCIAL  [FIDUCIAL-MICRO]  85.22,20.7 0 top
JP92  FIDUCIALUFIDUCIAL  [FIDUCIAL-MICRO]  85.22,20.7 0 bottom
JP93  STAND-OFF  [STAND-OFF]  107.44,22.61 0 top
JP94  STAND-OFF  [STAND-OFF]  87.12,22.61 0 top
JP95  FIDUCIALUFIDUCIAL  [FIDUCIAL-MICRO]  109.35,32.13 0 bottom
JP96  FIDUCIALUFIDUCIAL  [FIDUCIAL-MICRO]  108.71,30.23 0 top
JP97  JUMPER-SMT_2_NC_TRACE_SILK  [SMT-JUMPER_2_NC_TRACE_SILK]  92.2,23.5 0 top
JP98  JUMPER-SMT_3_2-NC_TRACE_SILK  [SMT-JUMPER_3_2-NC_TRACE_SILK]  102.74,27.94 90 top
JP99  JUMPER-SMT_2_NC_TRACE_SILK  [SMT-JUMPER_2_NC_TRACE_SILK]  100.58,25.15 0 top
JP100  JUMPER-SMT_2_NC_TRACE_SILK  [SMT-JUMPER_2_NC_TRACE_SILK]  95.25,25.78 0 top
JP101  FIDUCIALUFIDUCIAL  [FIDUCIAL-MICRO]  111.12,20.7 0 top
JP102  FIDUCIALUFIDUCIAL  [FIDUCIAL-MICRO]  111.12,20.7 0 bottom
JP103  STAND-OFF  [STAND-OFF]  133.35,22.61 0 top
JP104  STAND-OFF  [STAND-OFF]  113.03,22.61 0 top
JP105  FIDUCIALUFIDUCIAL  [FIDUCIAL-MICRO]  135.25,32.13 0 bottom
JP106  FIDUCIALUFIDUCIAL  [FIDUCIAL-MICRO]  134.62,30.23 0 top
JP107  JUMPER-SMT_2_NC_TRACE_SILK  [SMT-JUMPER_2_NC_TRACE_SILK]  118.11,23.5 0 top
JP108  JUMPER-SMT_3_2-NC_TRACE_SILK  [SMT-JUMPER_3_2-NC_TRACE_SILK]  128.65,27.94 90 top
JP109  JUMPER-SMT_2_NC_TRACE_SILK  [SMT-JUMPER_2_NC_TRACE_SILK]  126.49,25.15 0 top
JP110  JUMPER-SMT_2_NC_TRACE_SILK  [SMT-JUMPER_2_NC_TRACE_SILK]  121.16,25.78 0 top
JP111  FIDUCIALUFIDUCIAL  [FIDUCIAL-MICRO]  137.03,20.7 0 top
JP112  FIDUCIALUFIDUCIAL  [FIDUCIAL-MICRO]  137.03,20.7 0 bottom
JP113  STAND-OFF  [STAND-OFF]  159.26,22.61 0 top
JP114  STAND-OFF  [STAND-OFF]  138.94,22.61 0 top
JP115  FIDUCIALUFIDUCIAL  [FIDUCIAL-MICRO]  161.16,32.13 0 bottom
JP116  FIDUCIALUFIDUCIAL  [FIDUCIAL-MICRO]  160.53,30.23 0 top
JP117  JUMPER-SMT_2_NC_TRACE_SILK  [SMT-JUMPER_2_NC_TRACE_SILK]  144.02,23.5 0 top
JP118  JUMPER-SMT_3_2-NC_TRACE_SILK  [SMT-JUMPER_3_2-NC_TRACE_SILK]  154.56,27.94 90 top
JP119  JUMPER-SMT_2_NC_TRACE_SILK  [SMT-JUMPER_2_NC_TRACE_SILK]  152.4,25.15 0 top
JP120  JUMPER-SMT_2_NC_TRACE_SILK  [SMT-JUMPER_2_NC_TRACE_SILK]  147.07,25.78 0 top
JP121  FIDUCIALUFIDUCIAL  [FIDUCIAL-MICRO]  7.49,33.91 0 top
JP122  FIDUCIALUFIDUCIAL  [FIDUCIAL-MICRO]  7.49,33.91 0 bottom
JP123  STAND-OFF  [STAND-OFF]  29.72,35.81 0 top
JP124  STAND-OFF  [STAND-OFF]  9.4,35.81 0 top
JP125  FIDUCIALUFIDUCIAL  [FIDUCIAL-MICRO]  31.62,45.34 0 bottom
JP126  FIDUCIALUFIDUCIAL  [FIDUCIAL-MICRO]  30.99,43.43 0 top
JP127  JUMPER-SMT_2_NC_TRACE_SILK  [SMT-JUMPER_2_NC_TRACE_SILK]  14.48,36.7 0 top
JP128  JUMPER-SMT_3_2-NC_TRACE_SILK  [SMT-JUMPER_3_2-NC_TRACE_SILK]  25.02,41.15 90 top
JP129  JUMPER-SMT_2_NC_TRACE_SILK  [SMT-JUMPER_2_NC_TRACE_SILK]  22.86,38.35 0 top
JP130  JUMPER-SMT_2_NC_TRACE_SILK  [SMT-JUMPER_2_NC_TRACE_SILK]  17.53,38.99 0 top
JP131  FIDUCIALUFIDUCIAL  [FIDUCIAL-MICRO]  33.4,33.91 0 top
JP132  FIDUCIALUFIDUCIAL  [FIDUCIAL-MICRO]  33.4,33.91 0 bottom
JP133  STAND-OFF  [STAND-OFF]  55.63,35.81 0 top
JP134  STAND-OFF  [STAND-OFF]  35.31,35.81 0 top
JP135  FIDUCIALUFIDUCIAL  [FIDUCIAL-MICRO]  57.53,45.34 0 bottom
JP136  FIDUCIALUFIDUCIAL  [FIDUCIAL-MICRO]  56.9,43.43 0 top
JP137  JUMPER-SMT_2_NC_TRACE_SILK  [SMT-JUMPER_2_NC_TRACE_SILK]  40.39,36.7 0 top
JP138  JUMPER-SMT_3_2-NC_TRACE_SILK  [SMT-JUMPER_3_2-NC_TRACE_SILK]  50.93,41.15 90 top
JP139  JUMPER-SMT_2_NC_TRACE_SILK  [SMT-JUMPER_2_NC_TRACE_SILK]  48.77,38.35 0 top
JP140  JUMPER-SMT_2_NC_TRACE_SILK  [SMT-JUMPER_2_NC_TRACE_SILK]  43.43,38.99 0 top
JP141  FIDUCIALUFIDUCIAL  [FIDUCIAL-MICRO]  59.31,33.91 0 top
JP142  FIDUCIALUFIDUCIAL  [FIDUCIAL-MICRO]  59.31,33.91 0 bottom
JP143  STAND-OFF  [STAND-OFF]  81.53,35.81 0 top
JP144  STAND-OFF  [STAND-OFF]  61.21,35.81 0 top
JP145  FIDUCIALUFIDUCIAL  [FIDUCIAL-MICRO]  83.44,45.34 0 bottom
JP146  FIDUCIALUFIDUCIAL  [FIDUCIAL-MICRO]  82.8,43.43 0 top
JP147  JUMPER-SMT_2_NC_TRACE_SILK  [SMT-JUMPER_2_NC_TRACE_SILK]  66.29,36.7 0 top
JP148  JUMPER-SMT_3_2-NC_TRACE_SILK  [SMT-JUMPER_3_2-NC_TRACE_SILK]  76.84,41.15 90 top
JP149  JUMPER-SMT_2_NC_TRACE_SILK  [SMT-JUMPER_2_NC_TRACE_SILK]  74.68,38.35 0 top
JP150  JUMPER-SMT_2_NC_TRACE_SILK  [SMT-JUMPER_2_NC_TRACE_SILK]  69.34,38.99 0 top
JP151  FIDUCIALUFIDUCIAL  [FIDUCIAL-MICRO]  85.22,33.91 0 top
JP152  FIDUCIALUFIDUCIAL  [FIDUCIAL-MICRO]  85.22,33.91 0 bottom
JP153  STAND-OFF  [STAND-OFF]  107.44,35.81 0 top
JP154  STAND-OFF  [STAND-OFF]  87.12,35.81 0 top
JP155  FIDUCIALUFIDUCIAL  [FIDUCIAL-MICRO]  109.35,45.34 0 bottom
JP156  FIDUCIALUFIDUCIAL  [FIDUCIAL-MICRO]  108.71,43.43 0 top
JP157  JUMPER-SMT_2_NC_TRACE_SILK  [SMT-JUMPER_2_NC_TRACE_SILK]  92.2,36.7 0 top
JP158  JUMPER-SMT_3_2-NC_TRACE_SILK  [SMT-JUMPER_3_2-NC_TRACE_SILK]  102.74,41.15 90 top
JP159  JUMPER-SMT_2_NC_TRACE_SILK  [SMT-JUMPER_2_NC_TRACE_SILK]  100.58,38.35 0 top
JP160  JUMPER-SMT_2_NC_TRACE_SILK  [SMT-JUMPER_2_NC_TRACE_SILK]  95.25,38.99 0 top
JP161  FIDUCIALUFIDUCIAL  [FIDUCIAL-MICRO]  111.12,33.91 0 top
JP162  FIDUCIALUFIDUCIAL  [FIDUCIAL-MICRO]  111.12,33.91 0 bottom
JP163  STAND-OFF  [STAND-OFF]  133.35,35.81 0 top
JP164  STAND-OFF  [STAND-OFF]  113.03,35.81 0 top
JP165  FIDUCIALUFIDUCIAL  [FIDUCIAL-MICRO]  135.25,45.34 0 bottom
JP166  FIDUCIALUFIDUCIAL  [FIDUCIAL-MICRO]  134.62,43.43 0 top
JP167  JUMPER-SMT_2_NC_TRACE_SILK  [SMT-JUMPER_2_NC_TRACE_SILK]  118.11,36.7 0 top
JP168  JUMPER-SMT_3_2-NC_TRACE_SILK  [SMT-JUMPER_3_2-NC_TRACE_SILK]  128.65,41.15 90 top
JP169  JUMPER-SMT_2_NC_TRACE_SILK  [SMT-JUMPER_2_NC_TRACE_SILK]  126.49,38.35 0 top
JP170  JUMPER-SMT_2_NC_TRACE_SILK  [SMT-JUMPER_2_NC_TRACE_SILK]  121.16,38.99 0 top
JP171  FIDUCIALUFIDUCIAL  [FIDUCIAL-MICRO]  137.03,33.91 0 top
JP172  FIDUCIALUFIDUCIAL  [FIDUCIAL-MICRO]  137.03,33.91 0 bottom
JP173  STAND-OFF  [STAND-OFF]  159.26,35.81 0 top
JP174  STAND-OFF  [STAND-OFF]  138.94,35.81 0 top
JP175  FIDUCIALUFIDUCIAL  [FIDUCIAL-MICRO]  161.16,45.34 0 bottom
JP176  FIDUCIALUFIDUCIAL  [FIDUCIAL-MICRO]  160.53,43.43 0 top
JP177  JUMPER-SMT_2_NC_TRACE_SILK  [SMT-JUMPER_2_NC_TRACE_SILK]  144.02,36.7 0 top
JP178  JUMPER-SMT_3_2-NC_TRACE_SILK  [SMT-JUMPER_3_2-NC_TRACE_SILK]  154.56,41.15 90 top
JP179  JUMPER-SMT_2_NC_TRACE_SILK  [SMT-JUMPER_2_NC_TRACE_SILK]  152.4,38.35 0 top
JP180  JUMPER-SMT_2_NC_TRACE_SILK  [SMT-JUMPER_2_NC_TRACE_SILK]  147.07,38.99 0 top
JP181  FIDUCIALUFIDUCIAL  [FIDUCIAL-MICRO]  7.49,47.12 0 top
JP182  FIDUCIALUFIDUCIAL  [FIDUCIAL-MICRO]  7.49,47.12 0 bottom
JP183  STAND-OFF  [STAND-OFF]  29.72,49.02 0 top
JP184  STAND-OFF  [STAND-OFF]  9.4,49.02 0 top
JP185  FIDUCIALUFIDUCIAL  [FIDUCIAL-MICRO]  31.62,58.55 0 bottom
JP186  FIDUCIALUFIDUCIAL  [FIDUCIAL-MICRO]  30.99,56.64 0 top
JP187  JUMPER-SMT_2_NC_TRACE_SILK  [SMT-JUMPER_2_NC_TRACE_SILK]  14.48,49.91 0 top
JP188  JUMPER-SMT_3_2-NC_TRACE_SILK  [SMT-JUMPER_3_2-NC_TRACE_SILK]  25.02,54.36 90 top
JP189  JUMPER-SMT_2_NC_TRACE_SILK  [SMT-JUMPER_2_NC_TRACE_SILK]  22.86,51.56 0 top
JP190  JUMPER-SMT_2_NC_TRACE_SILK  [SMT-JUMPER_2_NC_TRACE_SILK]  17.53,52.2 0 top
JP191  FIDUCIALUFIDUCIAL  [FIDUCIAL-MICRO]  33.4,47.12 0 top
JP192  FIDUCIALUFIDUCIAL  [FIDUCIAL-MICRO]  33.4,47.12 0 bottom
JP193  STAND-OFF  [STAND-OFF]  55.63,49.02 0 top
JP194  STAND-OFF  [STAND-OFF]  35.31,49.02 0 top
JP195  FIDUCIALUFIDUCIAL  [FIDUCIAL-MICRO]  57.53,58.55 0 bottom
JP196  FIDUCIALUFIDUCIAL  [FIDUCIAL-MICRO]  56.9,56.64 0 top
JP197  JUMPER-SMT_2_NC_TRACE_SILK  [SMT-JUMPER_2_NC_TRACE_SILK]  40.39,49.91 0 top
JP198  JUMPER-SMT_3_2-NC_TRACE_SILK  [SMT-JUMPER_3_2-NC_TRACE_SILK]  50.93,54.36 90 top
JP199  JUMPER-SMT_2_NC_TRACE_SILK  [SMT-JUMPER_2_NC_TRACE_SILK]  48.77,51.56 0 top
JP200  JUMPER-SMT_2_NC_TRACE_SILK  [SMT-JUMPER_2_NC_TRACE_SILK]  43.43,52.2 0 top
JP201  FIDUCIALUFIDUCIAL  [FIDUCIAL-MICRO]  59.31,47.12 0 top
JP202  FIDUCIALUFIDUCIAL  [FIDUCIAL-MICRO]  59.31,47.12 0 bottom
JP203  STAND-OFF  [STAND-OFF]  81.53,49.02 0 top
JP204  STAND-OFF  [STAND-OFF]  61.21,49.02 0 top
JP205  FIDUCIALUFIDUCIAL  [FIDUCIAL-MICRO]  83.44,58.55 0 bottom
JP206  FIDUCIALUFIDUCIAL  [FIDUCIAL-MICRO]  82.8,56.64 0 top
JP207  JUMPER-SMT_2_NC_TRACE_SILK  [SMT-JUMPER_2_NC_TRACE_SILK]  66.29,49.91 0 top
JP208  JUMPER-SMT_3_2-NC_TRACE_SILK  [SMT-JUMPER_3_2-NC_TRACE_SILK]  76.84,54.36 90 top
JP209  JUMPER-SMT_2_NC_TRACE_SILK  [SMT-JUMPER_2_NC_TRACE_SILK]  74.68,51.56 0 top
JP210  JUMPER-SMT_2_NC_TRACE_SILK  [SMT-JUMPER_2_NC_TRACE_SILK]  69.34,52.2 0 top
JP211  FIDUCIALUFIDUCIAL  [FIDUCIAL-MICRO]  85.22,47.12 0 top
JP212  FIDUCIALUFIDUCIAL  [FIDUCIAL-MICRO]  85.22,47.12 0 bottom
JP213  STAND-OFF  [STAND-OFF]  107.44,49.02 0 top
JP214  STAND-OFF  [STAND-OFF]  87.12,49.02 0 top
JP215  FIDUCIALUFIDUCIAL  [FIDUCIAL-MICRO]  109.35,58.55 0 bottom
JP216  FIDUCIALUFIDUCIAL  [FIDUCIAL-MICRO]  108.71,56.64 0 top
JP217  JUMPER-SMT_2_NC_TRACE_SILK  [SMT-JUMPER_2_NC_TRACE_SILK]  92.2,49.91 0 top
JP218  JUMPER-SMT_3_2-NC_TRACE_SILK  [SMT-JUMPER_3_2-NC_TRACE_SILK]  102.74,54.36 90 top
JP219  JUMPER-SMT_2_NC_TRACE_SILK  [SMT-JUMPER_2_NC_TRACE_SILK]  100.58,51.56 0 top
JP220  JUMPER-SMT_2_NC_TRACE_SILK  [SMT-JUMPER_2_NC_TRACE_SILK]  95.25,52.2 0 top
JP221  FIDUCIALUFIDUCIAL  [FIDUCIAL-MICRO]  111.12,47.12 0 top
JP222  FIDUCIALUFIDUCIAL  [FIDUCIAL-MICRO]  111.12,47.12 0 bottom
JP223  STAND-OFF  [STAND-OFF]  133.35,49.02 0 top
JP224  STAND-OFF  [STAND-OFF]  113.03,49.02 0 top
JP225  FIDUCIALUFIDUCIAL  [FIDUCIAL-MICRO]  135.25,58.55 0 bottom
JP226  FIDUCIALUFIDUCIAL  [FIDUCIAL-MICRO]  134.62,56.64 0 top
JP227  JUMPER-SMT_2_NC_TRACE_SILK  [SMT-JUMPER_2_NC_TRACE_SILK]  118.11,49.91 0 top
JP228  JUMPER-SMT_3_2-NC_TRACE_SILK  [SMT-JUMPER_3_2-NC_TRACE_SILK]  128.65,54.36 90 top
JP229  JUMPER-SMT_2_NC_TRACE_SILK  [SMT-JUMPER_2_NC_TRACE_SILK]  126.49,51.56 0 top
JP230  JUMPER-SMT_2_NC_TRACE_SILK  [SMT-JUMPER_2_NC_TRACE_SILK]  121.16,52.2 0 top
JP231  FIDUCIALUFIDUCIAL  [FIDUCIAL-MICRO]  137.03,47.12 0 top
JP232  FIDUCIALUFIDUCIAL  [FIDUCIAL-MICRO]  137.03,47.12 0 bottom
JP233  STAND-OFF  [STAND-OFF]  159.26,49.02 0 top
JP234  STAND-OFF  [STAND-OFF]  138.94,49.02 0 top
JP235  FIDUCIALUFIDUCIAL  [FIDUCIAL-MICRO]  161.16,58.55 0 bottom
JP236  FIDUCIALUFIDUCIAL  [FIDUCIAL-MICRO]  160.53,56.64 0 top
JP237  JUMPER-SMT_2_NC_TRACE_SILK  [SMT-JUMPER_2_NC_TRACE_SILK]  144.02,49.91 0 top
JP238  JUMPER-SMT_3_2-NC_TRACE_SILK  [SMT-JUMPER_3_2-NC_TRACE_SILK]  154.56,54.36 90 top
JP239  JUMPER-SMT_2_NC_TRACE_SILK  [SMT-JUMPER_2_NC_TRACE_SILK]  152.4,51.56 0 top
JP240  JUMPER-SMT_2_NC_TRACE_SILK  [SMT-JUMPER_2_NC_TRACE_SILK]  147.07,52.2 0 top
JP241  FIDUCIALUFIDUCIAL  [FIDUCIAL-MICRO]  7.49,60.32 0 top
JP242  FIDUCIALUFIDUCIAL  [FIDUCIAL-MICRO]  7.49,60.32 0 bottom
JP243  STAND-OFF  [STAND-OFF]  29.72,62.23 0 top
JP244  STAND-OFF  [STAND-OFF]  9.4,62.23 0 top
JP245  FIDUCIALUFIDUCIAL  [FIDUCIAL-MICRO]  31.62,71.76 0 bottom
JP246  FIDUCIALUFIDUCIAL  [FIDUCIAL-MICRO]  30.99,69.85 0 top
JP247  JUMPER-SMT_2_NC_TRACE_SILK  [SMT-JUMPER_2_NC_TRACE_SILK]  14.48,63.12 0 top
JP248  JUMPER-SMT_3_2-NC_TRACE_SILK  [SMT-JUMPER_3_2-NC_TRACE_SILK]  25.02,67.56 90 top
JP249  JUMPER-SMT_2_NC_TRACE_SILK  [SMT-JUMPER_2_NC_TRACE_SILK]  22.86,64.77 0 top
JP250  JUMPER-SMT_2_NC_TRACE_SILK  [SMT-JUMPER_2_NC_TRACE_SILK]  17.53,65.41 0 top
JP251  FIDUCIALUFIDUCIAL  [FIDUCIAL-MICRO]  33.4,60.32 0 top
JP252  FIDUCIALUFIDUCIAL  [FIDUCIAL-MICRO]  33.4,60.32 0 bottom
JP253  STAND-OFF  [STAND-OFF]  55.63,62.23 0 top
JP254  STAND-OFF  [STAND-OFF]  35.31,62.23 0 top
JP255  FIDUCIALUFIDUCIAL  [FIDUCIAL-MICRO]  57.53,71.76 0 bottom
JP256  FIDUCIALUFIDUCIAL  [FIDUCIAL-MICRO]  56.9,69.85 0 top
JP257  JUMPER-SMT_2_NC_TRACE_SILK  [SMT-JUMPER_2_NC_TRACE_SILK]  40.39,63.12 0 top
JP258  JUMPER-SMT_3_2-NC_TRACE_SILK  [SMT-JUMPER_3_2-NC_TRACE_SILK]  50.93,67.56 90 top
JP259  JUMPER-SMT_2_NC_TRACE_SILK  [SMT-JUMPER_2_NC_TRACE_SILK]  48.77,64.77 0 top
JP260  JUMPER-SMT_2_NC_TRACE_SILK  [SMT-JUMPER_2_NC_TRACE_SILK]  43.43,65.41 0 top
JP261  FIDUCIALUFIDUCIAL  [FIDUCIAL-MICRO]  59.31,60.32 0 top
JP262  FIDUCIALUFIDUCIAL  [FIDUCIAL-MICRO]  59.31,60.32 0 bottom
JP263  STAND-OFF  [STAND-OFF]  81.53,62.23 0 top
JP264  STAND-OFF  [STAND-OFF]  61.21,62.23 0 top
JP265  FIDUCIALUFIDUCIAL  [FIDUCIAL-MICRO]  83.44,71.76 0 bottom
JP266  FIDUCIALUFIDUCIAL  [FIDUCIAL-MICRO]  82.8,69.85 0 top
JP267  JUMPER-SMT_2_NC_TRACE_SILK  [SMT-JUMPER_2_NC_TRACE_SILK]  66.29,63.12 0 top
JP268  JUMPER-SMT_3_2-NC_TRACE_SILK  [SMT-JUMPER_3_2-NC_TRACE_SILK]  76.84,67.56 90 top
JP269  JUMPER-SMT_2_NC_TRACE_SILK  [SMT-JUMPER_2_NC_TRACE_SILK]  74.68,64.77 0 top
JP270  JUMPER-SMT_2_NC_TRACE_SILK  [SMT-JUMPER_2_NC_TRACE_SILK]  69.34,65.41 0 top
JP271  FIDUCIALUFIDUCIAL  [FIDUCIAL-MICRO]  85.22,60.32 0 top
JP272  FIDUCIALUFIDUCIAL  [FIDUCIAL-MICRO]  85.22,60.32 0 bottom
JP273  STAND-OFF  [STAND-OFF]  107.44,62.23 0 top
JP274  STAND-OFF  [STAND-OFF]  87.12,62.23 0 top
JP275  FIDUCIALUFIDUCIAL  [FIDUCIAL-MICRO]  109.35,71.76 0 bottom
JP276  FIDUCIALUFIDUCIAL  [FIDUCIAL-MICRO]  108.71,69.85 0 top
JP277  JUMPER-SMT_2_NC_TRACE_SILK  [SMT-JUMPER_2_NC_TRACE_SILK]  92.2,63.12 0 top
JP278  JUMPER-SMT_3_2-NC_TRACE_SILK  [SMT-JUMPER_3_2-NC_TRACE_SILK]  102.74,67.56 90 top
JP279  JUMPER-SMT_2_NC_TRACE_SILK  [SMT-JUMPER_2_NC_TRACE_SILK]  100.58,64.77 0 top
JP280  JUMPER-SMT_2_NC_TRACE_SILK  [SMT-JUMPER_2_NC_TRACE_SILK]  95.25,65.41 0 top
JP281  FIDUCIALUFIDUCIAL  [FIDUCIAL-MICRO]  111.12,60.32 0 top
JP282  FIDUCIALUFIDUCIAL  [FIDUCIAL-MICRO]  111.12,60.32 0 bottom
JP283  STAND-OFF  [STAND-OFF]  133.35,62.23 0 top
JP284  STAND-OFF  [STAND-OFF]  113.03,62.23 0 top
JP285  FIDUCIALUFIDUCIAL  [FIDUCIAL-MICRO]  135.25,71.76 0 bottom
JP286  FIDUCIALUFIDUCIAL  [FIDUCIAL-MICRO]  134.62,69.85 0 top
JP287  JUMPER-SMT_2_NC_TRACE_SILK  [SMT-JUMPER_2_NC_TRACE_SILK]  118.11,63.12 0 top
JP288  JUMPER-SMT_3_2-NC_TRACE_SILK  [SMT-JUMPER_3_2-NC_TRACE_SILK]  128.65,67.56 90 top
JP289  JUMPER-SMT_2_NC_TRACE_SILK  [SMT-JUMPER_2_NC_TRACE_SILK]  126.49,64.77 0 top
JP290  JUMPER-SMT_2_NC_TRACE_SILK  [SMT-JUMPER_2_NC_TRACE_SILK]  121.16,65.41 0 top
JP291  FIDUCIALUFIDUCIAL  [FIDUCIAL-MICRO]  137.03,60.32 0 top
JP292  FIDUCIALUFIDUCIAL  [FIDUCIAL-MICRO]  137.03,60.32 0 bottom
JP293  STAND-OFF  [STAND-OFF]  159.26,62.23 0 top
JP294  STAND-OFF  [STAND-OFF]  138.94,62.23 0 top
JP295  FIDUCIALUFIDUCIAL  [FIDUCIAL-MICRO]  161.16,71.76 0 bottom
JP296  FIDUCIALUFIDUCIAL  [FIDUCIAL-MICRO]  160.53,69.85 0 top
JP297  JUMPER-SMT_2_NC_TRACE_SILK  [SMT-JUMPER_2_NC_TRACE_SILK]  144.02,63.12 0 top
JP298  JUMPER-SMT_3_2-NC_TRACE_SILK  [SMT-JUMPER_3_2-NC_TRACE_SILK]  154.56,67.56 90 top
JP299  JUMPER-SMT_2_NC_TRACE_SILK  [SMT-JUMPER_2_NC_TRACE_SILK]  152.4,64.77 0 top
JP300  JUMPER-SMT_2_NC_TRACE_SILK  [SMT-JUMPER_2_NC_TRACE_SILK]  147.07,65.41 0 top
JP301  FIDUCIALUFIDUCIAL  [FIDUCIAL-MICRO]  7.49,73.53 0 top
JP302  FIDUCIALUFIDUCIAL  [FIDUCIAL-MICRO]  7.49,73.53 0 bottom
JP303  STAND-OFF  [STAND-OFF]  29.72,75.44 0 top
JP304  STAND-OFF  [STAND-OFF]  9.4,75.44 0 top
JP305  FIDUCIALUFIDUCIAL  [FIDUCIAL-MICRO]  31.62,84.96 0 bottom
JP306  FIDUCIALUFIDUCIAL  [FIDUCIAL-MICRO]  30.99,83.06 0 top
JP307  JUMPER-SMT_2_NC_TRACE_SILK  [SMT-JUMPER_2_NC_TRACE_SILK]  14.48,76.33 0 top
JP308  JUMPER-SMT_3_2-NC_TRACE_SILK  [SMT-JUMPER_3_2-NC_TRACE_SILK]  25.02,80.77 90 top
JP309  JUMPER-SMT_2_NC_TRACE_SILK  [SMT-JUMPER_2_NC_TRACE_SILK]  22.86,77.98 0 top
JP310  JUMPER-SMT_2_NC_TRACE_SILK  [SMT-JUMPER_2_NC_TRACE_SILK]  17.53,78.61 0 top
JP311  FIDUCIALUFIDUCIAL  [FIDUCIAL-MICRO]  33.4,73.53 0 top
JP312  FIDUCIALUFIDUCIAL  [FIDUCIAL-MICRO]  33.4,73.53 0 bottom
JP313  STAND-OFF  [STAND-OFF]  55.63,75.44 0 top
JP314  STAND-OFF  [STAND-OFF]  35.31,75.44 0 top
JP315  FIDUCIALUFIDUCIAL  [FIDUCIAL-MICRO]  57.53,84.96 0 bottom
JP316  FIDUCIALUFIDUCIAL  [FIDUCIAL-MICRO]  56.9,83.06 0 top
JP317  JUMPER-SMT_2_NC_TRACE_SILK  [SMT-JUMPER_2_NC_TRACE_SILK]  40.39,76.33 0 top
JP318  JUMPER-SMT_3_2-NC_TRACE_SILK  [SMT-JUMPER_3_2-NC_TRACE_SILK]  50.93,80.77 90 top
JP319  JUMPER-SMT_2_NC_TRACE_SILK  [SMT-JUMPER_2_NC_TRACE_SILK]  48.77,77.98 0 top
JP320  JUMPER-SMT_2_NC_TRACE_SILK  [SMT-JUMPER_2_NC_TRACE_SILK]  43.43,78.61 0 top
JP321  FIDUCIALUFIDUCIAL  [FIDUCIAL-MICRO]  59.31,73.53 0 top
JP322  FIDUCIALUFIDUCIAL  [FIDUCIAL-MICRO]  59.31,73.53 0 bottom
JP323  STAND-OFF  [STAND-OFF]  81.53,75.44 0 top
JP324  STAND-OFF  [STAND-OFF]  61.21,75.44 0 top
JP325  FIDUCIALUFIDUCIAL  [FIDUCIAL-MICRO]  83.44,84.96 0 bottom
JP326  FIDUCIALUFIDUCIAL  [FIDUCIAL-MICRO]  82.8,83.06 0 top
JP327  JUMPER-SMT_2_NC_TRACE_SILK  [SMT-JUMPER_2_NC_TRACE_SILK]  66.29,76.33 0 top
JP328  JUMPER-SMT_3_2-NC_TRACE_SILK  [SMT-JUMPER_3_2-NC_TRACE_SILK]  76.84,80.77 90 top
JP329  JUMPER-SMT_2_NC_TRACE_SILK  [SMT-JUMPER_2_NC_TRACE_SILK]  74.68,77.98 0 top
JP330  JUMPER-SMT_2_NC_TRACE_SILK  [SMT-JUMPER_2_NC_TRACE_SILK]  69.34,78.61 0 top
JP331  FIDUCIALUFIDUCIAL  [FIDUCIAL-MICRO]  85.22,73.53 0 top
JP332  FIDUCIALUFIDUCIAL  [FIDUCIAL-MICRO]  85.22,73.53 0 bottom
JP333  STAND-OFF  [STAND-OFF]  107.44,75.44 0 top
JP334  STAND-OFF  [STAND-OFF]  87.12,75.44 0 top
JP335  FIDUCIALUFIDUCIAL  [FIDUCIAL-MICRO]  109.35,84.96 0 bottom
JP336  FIDUCIALUFIDUCIAL  [FIDUCIAL-MICRO]  108.71,83.06 0 top
JP337  JUMPER-SMT_2_NC_TRACE_SILK  [SMT-JUMPER_2_NC_TRACE_SILK]  92.2,76.33 0 top
JP338  JUMPER-SMT_3_2-NC_TRACE_SILK  [SMT-JUMPER_3_2-NC_TRACE_SILK]  102.74,80.77 90 top
JP339  JUMPER-SMT_2_NC_TRACE_SILK  [SMT-JUMPER_2_NC_TRACE_SILK]  100.58,77.98 0 top
JP340  JUMPER-SMT_2_NC_TRACE_SILK  [SMT-JUMPER_2_NC_TRACE_SILK]  95.25,78.61 0 top
JP341  FIDUCIALUFIDUCIAL  [FIDUCIAL-MICRO]  111.12,73.53 0 top
JP342  FIDUCIALUFIDUCIAL  [FIDUCIAL-MICRO]  111.12,73.53 0 bottom
JP343  STAND-OFF  [STAND-OFF]  133.35,75.44 0 top
JP344  STAND-OFF  [STAND-OFF]  113.03,75.44 0 top
JP345  FIDUCIALUFIDUCIAL  [FIDUCIAL-MICRO]  135.25,84.96 0 bottom
JP346  FIDUCIALUFIDUCIAL  [FIDUCIAL-MICRO]  134.62,83.06 0 top
JP347  JUMPER-SMT_2_NC_TRACE_SILK  [SMT-JUMPER_2_NC_TRACE_SILK]  118.11,76.33 0 top
JP348  JUMPER-SMT_3_2-NC_TRACE_SILK  [SMT-JUMPER_3_2-NC_TRACE_SILK]  128.65,80.77 90 top
JP349  JUMPER-SMT_2_NC_TRACE_SILK  [SMT-JUMPER_2_NC_TRACE_SILK]  126.49,77.98 0 top
JP350  JUMPER-SMT_2_NC_TRACE_SILK  [SMT-JUMPER_2_NC_TRACE_SILK]  121.16,78.61 0 top
JP351  FIDUCIALUFIDUCIAL  [FIDUCIAL-MICRO]  137.03,73.53 0 top
JP352  FIDUCIALUFIDUCIAL  [FIDUCIAL-MICRO]  137.03,73.53 0 bottom
JP353  STAND-OFF  [STAND-OFF]  159.26,75.44 0 top
JP354  STAND-OFF  [STAND-OFF]  138.94,75.44 0 top
JP355  FIDUCIALUFIDUCIAL  [FIDUCIAL-MICRO]  161.16,84.96 0 bottom
JP356  FIDUCIALUFIDUCIAL  [FIDUCIAL-MICRO]  160.53,83.06 0 top
JP357  JUMPER-SMT_2_NC_TRACE_SILK  [SMT-JUMPER_2_NC_TRACE_SILK]  144.02,76.33 0 top
JP358  JUMPER-SMT_3_2-NC_TRACE_SILK  [SMT-JUMPER_3_2-NC_TRACE_SILK]  154.56,80.77 90 top
JP359  JUMPER-SMT_2_NC_TRACE_SILK  [SMT-JUMPER_2_NC_TRACE_SILK]  152.4,77.98 0 top
JP360  JUMPER-SMT_2_NC_TRACE_SILK  [SMT-JUMPER_2_NC_TRACE_SILK]  147.07,78.61 0 top
LOGO1  OSHW-LOGOS  [OSHW-LOGO-S]  28.45,11.94 0 bottom
LOGO2  SFE_LOGO_NAME_FLAME7_MM  [SFE_LOGO_NAME_FLAME_7MM]  11.94,14.48 0 bottom
LOGO3  QWIIC_LOGO_CONNECTOR  [QWIIC_5.5MM]  28.45,16.38 0 bottom
LOGO4  SFE_LOGO_NAME5_MM  [SFE_LOGO_NAME_5MM]  20.95,18.29 0 top
LOGO5  OSHW-LOGOS  [OSHW-LOGO-S]  54.36,11.94 0 bottom
LOGO6  SFE_LOGO_FLAME.1_INCH  [SFE_LOGO_FLAME_.1]  12.19,11.05 0 top
LOGO7  QWIIC_LOGO_CONNECTOR  [QWIIC_5.5MM]  54.36,16.38 0 bottom
LOGO8  SFE_LOGO_NAME_FLAME7_MM  [SFE_LOGO_NAME_FLAME_7MM]  37.85,14.48 0 bottom
LOGO9  SFE_LOGO_FLAME.1_INCH  [SFE_LOGO_FLAME_.1]  38.1,11.05 0 top
LOGO10  SFE_LOGO_NAME5_MM  [SFE_LOGO_NAME_5MM]  46.86,18.29 0 top
LOGO11  OSHW-LOGOS  [OSHW-LOGO-S]  80.26,11.94 0 bottom
LOGO12  QWIIC_LOGO_CONNECTOR  [QWIIC_5.5MM]  80.26,16.38 0 bottom
LOGO13  SFE_LOGO_NAME_FLAME7_MM  [SFE_LOGO_NAME_FLAME_7MM]  63.75,14.48 0 bottom
LOGO14  SFE_LOGO_FLAME.1_INCH  [SFE_LOGO_FLAME_.1]  64.01,11.05 0 top
LOGO15  SFE_LOGO_NAME5_MM  [SFE_LOGO_NAME_5MM]  72.77,18.29 0 top
LOGO16  OSHW-LOGOS  [OSHW-LOGO-S]  106.17,11.94 0 bottom
LOGO17  QWIIC_LOGO_CONNECTOR  [QWIIC_5.5MM]  106.17,16.38 0 bottom
LOGO18  SFE_LOGO_NAME_FLAME7_MM  [SFE_LOGO_NAME_FLAME_7MM]  89.66,14.48 0 bottom
LOGO19  SFE_LOGO_FLAME.1_INCH  [SFE_LOGO_FLAME_.1]  89.92,11.05 0 top
LOGO20  SFE_LOGO_NAME5_MM  [SFE_LOGO_NAME_5MM]  98.68,18.29 0 top
LOGO21  OSHW-LOGOS  [OSHW-LOGO-S]  132.08,11.94 0 bottom
LOGO22  QWIIC_LOGO_CONNECTOR  [QWIIC_5.5MM]  132.08,16.38 0 bottom
LOGO23  SFE_LOGO_NAME_FLAME7_MM  [SFE_LOGO_NAME_FLAME_7MM]  115.57,14.48 0 bottom
LOGO24  SFE_LOGO_FLAME.1_INCH  [SFE_LOGO_FLAME_.1]  115.82,11.05 0 top
LOGO25  SFE_LOGO_NAME5_MM  [SFE_LOGO_NAME_5MM]  124.59,18.29 0 top
LOGO26  OSHW-LOGOS  [OSHW-LOGO-S]  157.99,11.94 0 bottom
LOGO27  QWIIC_LOGO_CONNECTOR  [QWIIC_5.5MM]  157.99,16.38 0 bottom
LOGO28  SFE_LOGO_NAME_FLAME7_MM  [SFE_LOGO_NAME_FLAME_7MM]  141.48,14.48 0 bottom
LOGO29  SFE_LOGO_FLAME.1_INCH  [SFE_LOGO_FLAME_.1]  141.73,11.05 0 top
LOGO30  SFE_LOGO_NAME5_MM  [SFE_LOGO_NAME_5MM]  150.5,18.29 0 top
LOGO31  OSHW-LOGOS  [OSHW-LOGO-S]  28.45,25.15 0 bottom
LOGO32  QWIIC_LOGO_CONNECTOR  [QWIIC_5.5MM]  28.45,29.59 0 bottom
LOGO33  SFE_LOGO_NAME_FLAME7_MM  [SFE_LOGO_NAME_FLAME_7MM]  11.94,27.69 0 bottom
LOGO34  SFE_LOGO_FLAME.1_INCH  [SFE_LOGO_FLAME_.1]  12.19,24.26 0 top
LOGO35  SFE_LOGO_NAME5_MM  [SFE_LOGO_NAME_5MM]  20.95,31.5 0 top
LOGO36  OSHW-LOGOS  [OSHW-LOGO-S]  54.36,25.15 0 bottom
LOGO37  QWIIC_LOGO_CONNECTOR  [QWIIC_5.5MM]  54.36,29.59 0 bottom
LOGO38  SFE_LOGO_NAME_FLAME7_MM  [SFE_LOGO_NAME_FLAME_7MM]  37.85,27.69 0 bottom
LOGO39  SFE_LOGO_FLAME.1_INCH  [SFE_LOGO_FLAME_.1]  38.1,24.26 0 top
LOGO40  SFE_LOGO_NAME5_MM  [SFE_LOGO_NAME_5MM]  46.86,31.5 0 top
LOGO41  OSHW-LOGOS  [OSHW-LOGO-S]  80.26,25.15 0 bottom
LOGO42  QWIIC_LOGO_CONNECTOR  [QWIIC_5.5MM]  80.26,29.59 0 bottom
LOGO43  SFE_LOGO_NAME_FLAME7_MM  [SFE_LOGO_NAME_FLAME_7MM]  63.75,27.69 0 bottom
LOGO44  SFE_LOGO_FLAME.1_INCH  [SFE_LOGO_FLAME_.1]  64.01,24.26 0 top
LOGO45  SFE_LOGO_NAME5_MM  [SFE_LOGO_NAME_5MM]  72.77,31.5 0 top
LOGO46  OSHW-LOGOS  [OSHW-LOGO-S]  106.17,25.15 0 bottom
LOGO47  QWIIC_LOGO_CONNECTOR  [QWIIC_5.5MM]  106.17,29.59 0 bottom
LOGO48  SFE_LOGO_NAME_FLAME7_MM  [SFE_LOGO_NAME_FLAME_7MM]  89.66,27.69 0 bottom
LOGO49  SFE_LOGO_FLAME.1_INCH  [SFE_LOGO_FLAME_.1]  89.92,24.26 0 top
LOGO50  SFE_LOGO_NAME5_MM  [SFE_LOGO_NAME_5MM]  98.68,31.5 0 top
LOGO51  OSHW-LOGOS  [OSHW-LOGO-S]  132.08,25.15 0 bottom
LOGO52  QWIIC_LOGO_CONNECTOR  [QWIIC_5.5MM]  132.08,29.59 0 bottom
LOGO53  SFE_LOGO_NAME_FLAME7_MM  [SFE_LOGO_NAME_FLAME_7MM]  115.57,27.69 0 bottom
LOGO54  SFE_LOGO_FLAME.1_INCH  [SFE_LOGO_FLAME_.1]  115.82,24.26 0 top
LOGO55  SFE_LOGO_NAME5_MM  [SFE_LOGO_NAME_5MM]  124.59,31.5 0 top
LOGO56  OSHW-LOGOS  [OSHW-LOGO-S]  157.99,25.15 0 bottom
LOGO57  QWIIC_LOGO_CONNECTOR  [QWIIC_5.5MM]  157.99,29.59 0 bottom
LOGO58  SFE_LOGO_NAME_FLAME7_MM  [SFE_LOGO_NAME_FLAME_7MM]  141.48,27.69 0 bottom
LOGO59  SFE_LOGO_FLAME.1_INCH  [SFE_LOGO_FLAME_.1]  141.73,24.26 0 top
LOGO60  SFE_LOGO_NAME5_MM  [SFE_LOGO_NAME_5MM]  150.5,31.5 0 top
LOGO61  OSHW-LOGOS  [OSHW-LOGO-S]  28.45,38.35 0 bottom
LOGO62  QWIIC_LOGO_CONNECTOR  [QWIIC_5.5MM]  28.45,42.8 0 bottom
LOGO63  SFE_LOGO_NAME_FLAME7_MM  [SFE_LOGO_NAME_FLAME_7MM]  11.94,40.89 0 bottom
LOGO64  SFE_LOGO_FLAME.1_INCH  [SFE_LOGO_FLAME_.1]  12.19,37.46 0 top
LOGO65  SFE_LOGO_NAME5_MM  [SFE_LOGO_NAME_5MM]  20.95,44.7 0 top
LOGO66  OSHW-LOGOS  [OSHW-LOGO-S]  54.36,38.35 0 bottom
LOGO67  QWIIC_LOGO_CONNECTOR  [QWIIC_5.5MM]  54.36,42.8 0 bottom
LOGO68  SFE_LOGO_NAME_FLAME7_MM  [SFE_LOGO_NAME_FLAME_7MM]  37.85,40.89 0 bottom
LOGO69  SFE_LOGO_FLAME.1_INCH  [SFE_LOGO_FLAME_.1]  38.1,37.46 0 top
LOGO70  SFE_LOGO_NAME5_MM  [SFE_LOGO_NAME_5MM]  46.86,44.7 0 top
LOGO71  OSHW-LOGOS  [OSHW-LOGO-S]  80.26,38.35 0 bottom
LOGO72  QWIIC_LOGO_CONNECTOR  [QWIIC_5.5MM]  80.26,42.8 0 bottom
LOGO73  SFE_LOGO_NAME_FLAME7_MM  [SFE_LOGO_NAME_FLAME_7MM]  63.75,40.89 0 bottom
LOGO74  SFE_LOGO_FLAME.1_INCH  [SFE_LOGO_FLAME_.1]  64.01,37.46 0 top
LOGO75  SFE_LOGO_NAME5_MM  [SFE_LOGO_NAME_5MM]  72.77,44.7 0 top
LOGO76  OSHW-LOGOS  [OSHW-LOGO-S]  106.17,38.35 0 bottom
LOGO77  QWIIC_LOGO_CONNECTOR  [QWIIC_5.5MM]  106.17,42.8 0 bottom
LOGO78  SFE_LOGO_NAME_FLAME7_MM  [SFE_LOGO_NAME_FLAME_7MM]  89.66,40.89 0 bottom
LOGO79  SFE_LOGO_FLAME.1_INCH  [SFE_LOGO_FLAME_.1]  89.92,37.46 0 top
LOGO80  SFE_LOGO_NAME5_MM  [SFE_LOGO_NAME_5MM]  98.68,44.7 0 top
LOGO81  OSHW-LOGOS  [OSHW-LOGO-S]  132.08,38.35 0 bottom
LOGO82  QWIIC_LOGO_CONNECTOR  [QWIIC_5.5MM]  132.08,42.8 0 bottom
LOGO83  SFE_LOGO_NAME_FLAME7_MM  [SFE_LOGO_NAME_FLAME_7MM]  115.57,40.89 0 bottom
LOGO84  SFE_LOGO_FLAME.1_INCH  [SFE_LOGO_FLAME_.1]  115.82,37.46 0 top
LOGO85  SFE_LOGO_NAME5_MM  [SFE_LOGO_NAME_5MM]  124.59,44.7 0 top
LOGO86  OSHW-LOGOS  [OSHW-LOGO-S]  157.99,38.35 0 bottom
LOGO87  QWIIC_LOGO_CONNECTOR  [QWIIC_5.5MM]  157.99,42.8 0 bottom
LOGO88  SFE_LOGO_NAME_FLAME7_MM  [SFE_LOGO_NAME_FLAME_7MM]  141.48,40.89 0 bottom
LOGO89  SFE_LOGO_FLAME.1_INCH  [SFE_LOGO_FLAME_.1]  141.73,37.46 0 top
LOGO90  SFE_LOGO_NAME5_MM  [SFE_LOGO_NAME_5MM]  150.5,44.7 0 top
LOGO91  OSHW-LOGOS  [OSHW-LOGO-S]  28.45,51.56 0 bottom
LOGO92  QWIIC_LOGO_CONNECTOR  [QWIIC_5.5MM]  28.45,56.01 0 bottom
LOGO93  SFE_LOGO_NAME_FLAME7_MM  [SFE_LOGO_NAME_FLAME_7MM]  11.94,54.1 0 bottom
LOGO94  SFE_LOGO_FLAME.1_INCH  [SFE_LOGO_FLAME_.1]  12.19,50.67 0 top
LOGO95  SFE_LOGO_NAME5_MM  [SFE_LOGO_NAME_5MM]  20.95,57.91 0 top
LOGO96  OSHW-LOGOS  [OSHW-LOGO-S]  54.36,51.56 0 bottom
LOGO97  QWIIC_LOGO_CONNECTOR  [QWIIC_5.5MM]  54.36,56.01 0 bottom
LOGO98  SFE_LOGO_NAME_FLAME7_MM  [SFE_LOGO_NAME_FLAME_7MM]  37.85,54.1 0 bottom
LOGO99  SFE_LOGO_FLAME.1_INCH  [SFE_LOGO_FLAME_.1]  38.1,50.67 0 top
LOGO100  SFE_LOGO_NAME5_MM  [SFE_LOGO_NAME_5MM]  46.86,57.91 0 top
LOGO101  OSHW-LOGOS  [OSHW-LOGO-S]  80.26,51.56 0 bottom
LOGO102  QWIIC_LOGO_CONNECTOR  [QWIIC_5.5MM]  80.26,56.01 0 bottom
LOGO103  SFE_LOGO_NAME_FLAME7_MM  [SFE_LOGO_NAME_FLAME_7MM]  63.75,54.1 0 bottom
LOGO104  SFE_LOGO_FLAME.1_INCH  [SFE_LOGO_FLAME_.1]  64.01,50.67 0 top
LOGO105  SFE_LOGO_NAME5_MM  [SFE_LOGO_NAME_5MM]  72.77,57.91 0 top
LOGO106  OSHW-LOGOS  [OSHW-LOGO-S]  106.17,51.56 0 bottom
LOGO107  QWIIC_LOGO_CONNECTOR  [QWIIC_5.5MM]  106.17,56.01 0 bottom
LOGO108  SFE_LOGO_NAME_FLAME7_MM  [SFE_LOGO_NAME_FLAME_7MM]  89.66,54.1 0 bottom
LOGO109  SFE_LOGO_FLAME.1_INCH  [SFE_LOGO_FLAME_.1]  89.92,50.67 0 top
LOGO110  SFE_LOGO_NAME5_MM  [SFE_LOGO_NAME_5MM]  98.68,57.91 0 top
LOGO111  OSHW-LOGOS  [OSHW-LOGO-S]  132.08,51.56 0 bottom
LOGO112  QWIIC_LOGO_CONNECTOR  [QWIIC_5.5MM]  132.08,56.01 0 bottom
LOGO113  SFE_LOGO_NAME_FLAME7_MM  [SFE_LOGO_NAME_FLAME_7MM]  115.57,54.1 0 bottom
LOGO114  SFE_LOGO_FLAME.1_INCH  [SFE_LOGO_FLAME_.1]  115.82,50.67 0 top
LOGO115  SFE_LOGO_NAME5_MM  [SFE_LOGO_NAME_5MM]  124.59,57.91 0 top
LOGO116  OSHW-LOGOS  [OSHW-LOGO-S]  157.99,51.56 0 bottom
LOGO117  QWIIC_LOGO_CONNECTOR  [QWIIC_5.5MM]  157.99,56.01 0 bottom
LOGO118  SFE_LOGO_NAME_FLAME7_MM  [SFE_LOGO_NAME_FLAME_7MM]  141.48,54.1 0 bottom
LOGO119  SFE_LOGO_FLAME.1_INCH  [SFE_LOGO_FLAME_.1]  141.73,50.67 0 top
LOGO120  SFE_LOGO_NAME5_MM  [SFE_LOGO_NAME_5MM]  150.5,57.91 0 top
LOGO121  OSHW-LOGOS  [OSHW-LOGO-S]  28.45,64.77 0 bottom
LOGO122  QWIIC_LOGO_CONNECTOR  [QWIIC_5.5MM]  28.45,69.22 0 bottom
LOGO123  SFE_LOGO_NAME_FLAME7_MM  [SFE_LOGO_NAME_FLAME_7MM]  11.94,67.31 0 bottom
LOGO124  SFE_LOGO_FLAME.1_INCH  [SFE_LOGO_FLAME_.1]  12.19,63.88 0 top
LOGO125  SFE_LOGO_NAME5_MM  [SFE_LOGO_NAME_5MM]  20.95,71.12 0 top
LOGO126  OSHW-LOGOS  [OSHW-LOGO-S]  54.36,64.77 0 bottom
LOGO127  QWIIC_LOGO_CONNECTOR  [QWIIC_5.5MM]  54.36,69.22 0 bottom
LOGO128  SFE_LOGO_NAME_FLAME7_MM  [SFE_LOGO_NAME_FLAME_7MM]  37.85,67.31 0 bottom
LOGO129  SFE_LOGO_FLAME.1_INCH  [SFE_LOGO_FLAME_.1]  38.1,63.88 0 top
LOGO130  SFE_LOGO_NAME5_MM  [SFE_LOGO_NAME_5MM]  46.86,71.12 0 top
LOGO131  OSHW-LOGOS  [OSHW-LOGO-S]  80.26,64.77 0 bottom
LOGO132  QWIIC_LOGO_CONNECTOR  [QWIIC_5.5MM]  80.26,69.22 0 bottom
LOGO133  SFE_LOGO_NAME_FLAME7_MM  [SFE_LOGO_NAME_FLAME_7MM]  63.75,67.31 0 bottom
LOGO134  SFE_LOGO_FLAME.1_INCH  [SFE_LOGO_FLAME_.1]  64.01,63.88 0 top
LOGO135  SFE_LOGO_NAME5_MM  [SFE_LOGO_NAME_5MM]  72.77,71.12 0 top
LOGO136  OSHW-LOGOS  [OSHW-LOGO-S]  106.17,64.77 0 bottom
LOGO137  QWIIC_LOGO_CONNECTOR  [QWIIC_5.5MM]  106.17,69.22 0 bottom
LOGO138  SFE_LOGO_NAME_FLAME7_MM  [SFE_LOGO_NAME_FLAME_7MM]  89.66,67.31 0 bottom
LOGO139  SFE_LOGO_FLAME.1_INCH  [SFE_LOGO_FLAME_.1]  89.92,63.88 0 top
LOGO140  SFE_LOGO_NAME5_MM  [SFE_LOGO_NAME_5MM]  98.68,71.12 0 top
LOGO141  OSHW-LOGOS  [OSHW-LOGO-S]  132.08,64.77 0 bottom
LOGO142  QWIIC_LOGO_CONNECTOR  [QWIIC_5.5MM]  132.08,69.22 0 bottom
LOGO143  SFE_LOGO_NAME_FLAME7_MM  [SFE_LOGO_NAME_FLAME_7MM]  115.57,67.31 0 bottom
LOGO144  SFE_LOGO_FLAME.1_INCH  [SFE_LOGO_FLAME_.1]  115.82,63.88 0 top
LOGO145  SFE_LOGO_NAME5_MM  [SFE_LOGO_NAME_5MM]  124.59,71.12 0 top
LOGO146  OSHW-LOGOS  [OSHW-LOGO-S]  157.99,64.77 0 bottom
LOGO147  QWIIC_LOGO_CONNECTOR  [QWIIC_5.5MM]  157.99,69.22 0 bottom
LOGO148  SFE_LOGO_NAME_FLAME7_MM  [SFE_LOGO_NAME_FLAME_7MM]  141.48,67.31 0 bottom
LOGO149  SFE_LOGO_FLAME.1_INCH  [SFE_LOGO_FLAME_.1]  141.73,63.88 0 top
LOGO150  SFE_LOGO_NAME5_MM  [SFE_LOGO_NAME_5MM]  150.5,71.12 0 top
LOGO151  OSHW-LOGOS  [OSHW-LOGO-S]  28.45,77.98 0 bottom
LOGO152  QWIIC_LOGO_CONNECTOR  [QWIIC_5.5MM]  28.45,82.42 0 bottom
LOGO153  SFE_LOGO_NAME_FLAME7_MM  [SFE_LOGO_NAME_FLAME_7MM]  11.94,80.52 0 bottom
LOGO154  SFE_LOGO_FLAME.1_INCH  [SFE_LOGO_FLAME_.1]  12.19,77.09 0 top
LOGO155  SFE_LOGO_NAME5_MM  [SFE_LOGO_NAME_5MM]  20.95,84.33 0 top
LOGO156  OSHW-LOGOS  [OSHW-LOGO-S]  54.36,77.98 0 bottom
LOGO157  QWIIC_LOGO_CONNECTOR  [QWIIC_5.5MM]  54.36,82.42 0 bottom
LOGO158  SFE_LOGO_NAME_FLAME7_MM  [SFE_LOGO_NAME_FLAME_7MM]  37.85,80.52 0 bottom
LOGO159  SFE_LOGO_FLAME.1_INCH  [SFE_LOGO_FLAME_.1]  38.1,77.09 0 top
LOGO160  SFE_LOGO_NAME5_MM  [SFE_LOGO_NAME_5MM]  46.86,84.33 0 top
LOGO161  OSHW-LOGOS  [OSHW-LOGO-S]  80.26,77.98 0 bottom
LOGO162  QWIIC_LOGO_CONNECTOR  [QWIIC_5.5MM]  80.26,82.42 0 bottom
LOGO163  SFE_LOGO_NAME_FLAME7_MM  [SFE_LOGO_NAME_FLAME_7MM]  63.75,80.52 0 bottom
LOGO164  SFE_LOGO_FLAME.1_INCH  [SFE_LOGO_FLAME_.1]  64.01,77.09 0 top
LOGO165  SFE_LOGO_NAME5_MM  [SFE_LOGO_NAME_5MM]  72.77,84.33 0 top
LOGO166  OSHW-LOGOS  [OSHW-LOGO-S]  106.17,77.98 0 bottom
LOGO167  QWIIC_LOGO_CONNECTOR  [QWIIC_5.5MM]  106.17,82.42 0 bottom
LOGO168  SFE_LOGO_NAME_FLAME7_MM  [SFE_LOGO_NAME_FLAME_7MM]  89.66,80.52 0 bottom
LOGO169  SFE_LOGO_FLAME.1_INCH  [SFE_LOGO_FLAME_.1]  89.92,77.09 0 top
LOGO170  SFE_LOGO_NAME5_MM  [SFE_LOGO_NAME_5MM]  98.68,84.33 0 top
LOGO171  OSHW-LOGOS  [OSHW-LOGO-S]  132.08,77.98 0 bottom